# Altium PCB STM32EVALBOARD.PcbDoc (part 1 of 2)
Units mil, origin at the board's own origin, x right, y up, seen from the top; angles counter-clockwise.
Board outline 3937.01 x 3937.01 mil, 4 copper layers (Top Layer, GND, POWER, Bottom Layer), stack 23.756 mil thick; 220 components, 164 nets, 674 pads, 227 vias.
Unrouted connection lines stored in the file: 178.
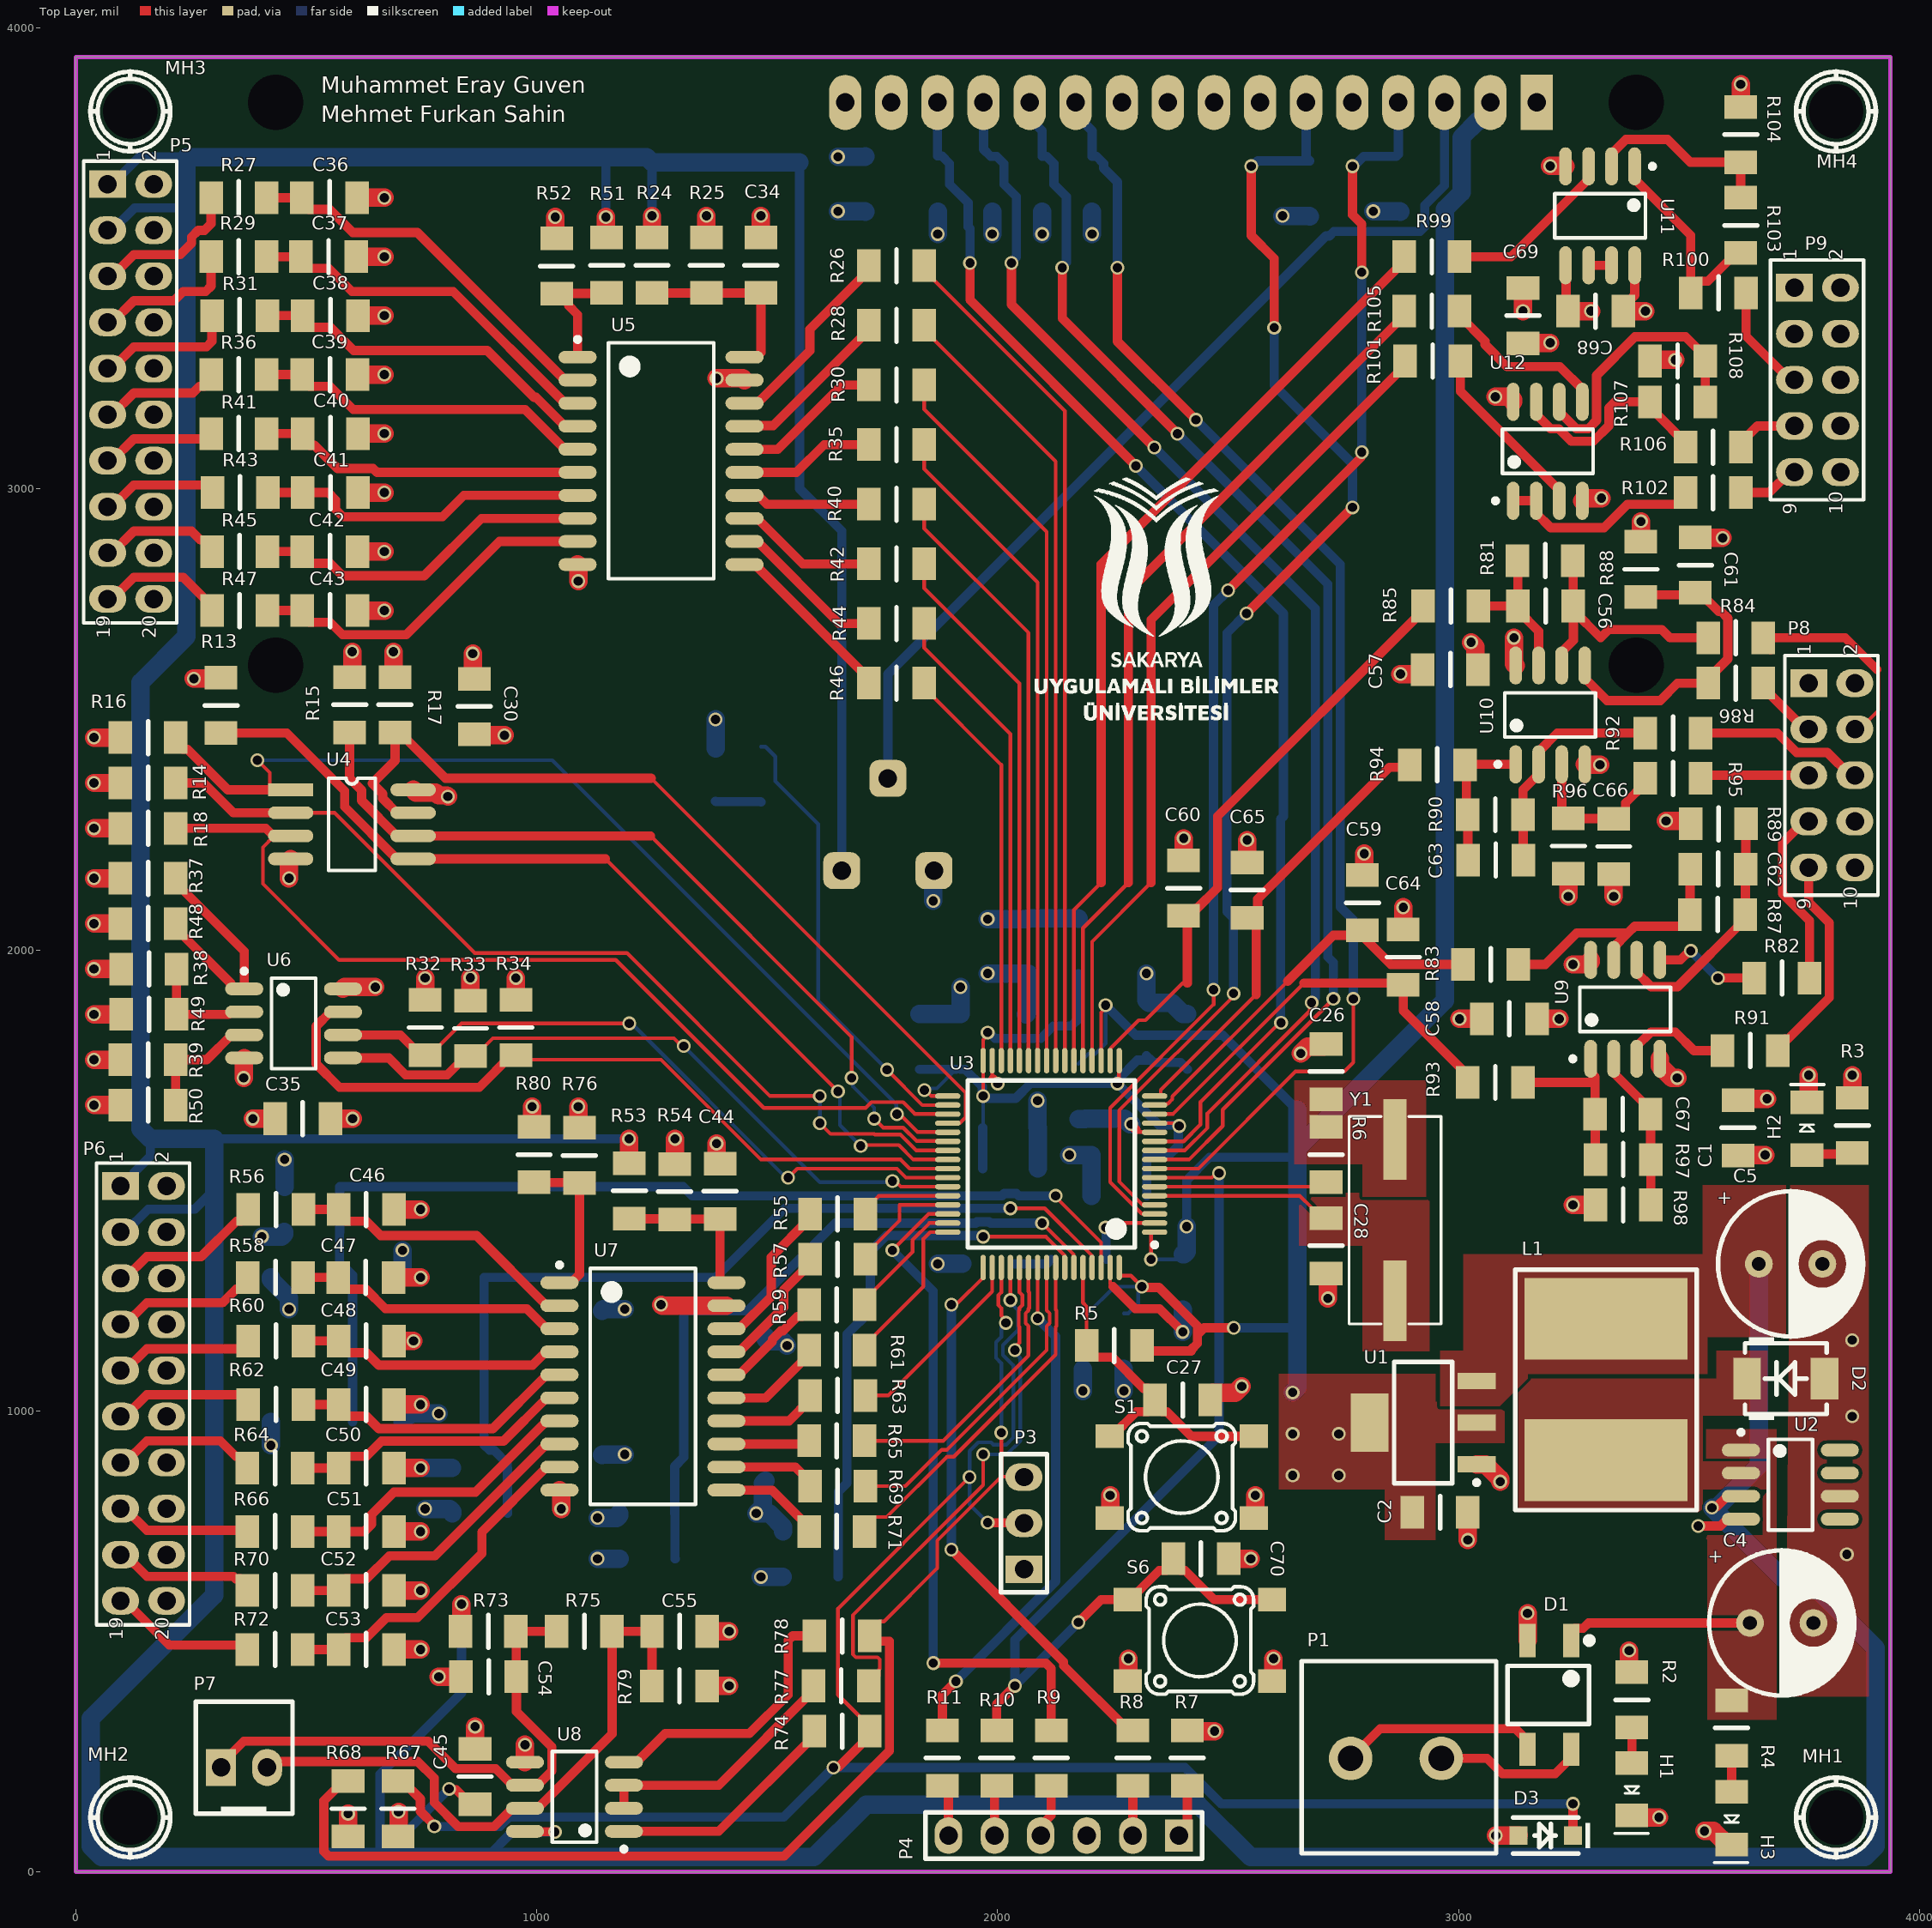
[diagram p0: Top Layer view]
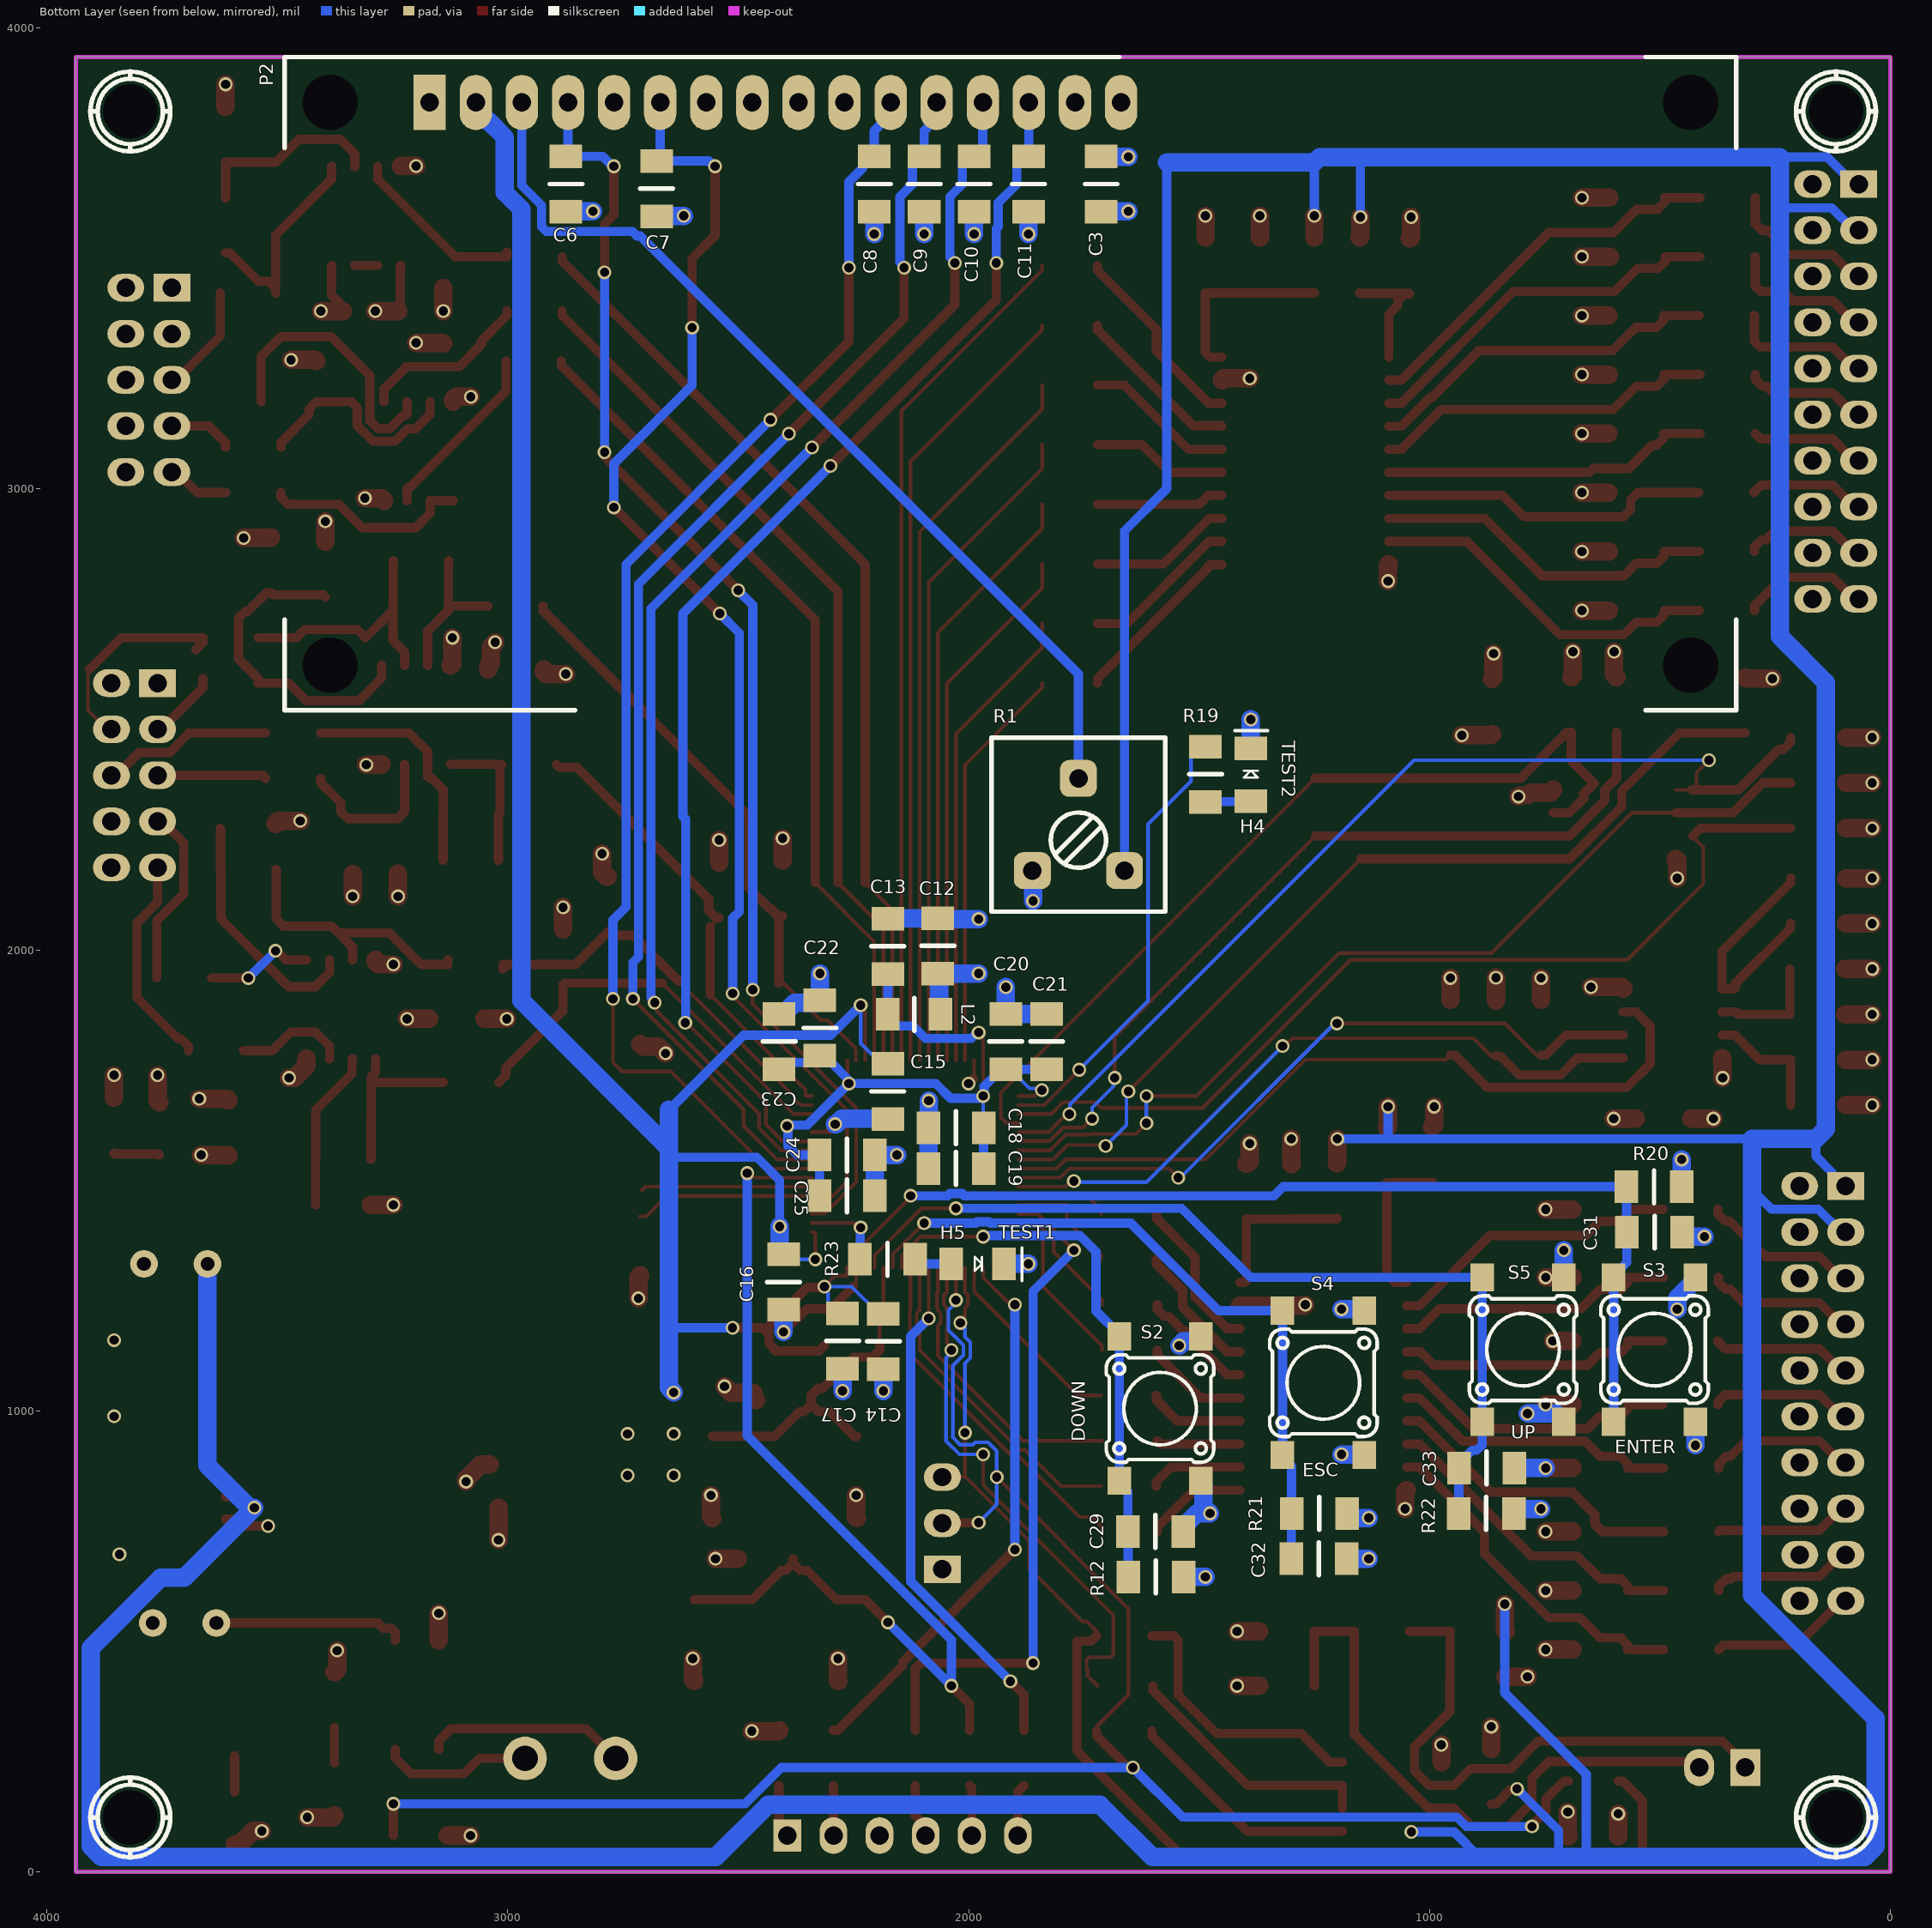
[diagram p1: Bottom Layer view, seen from below]
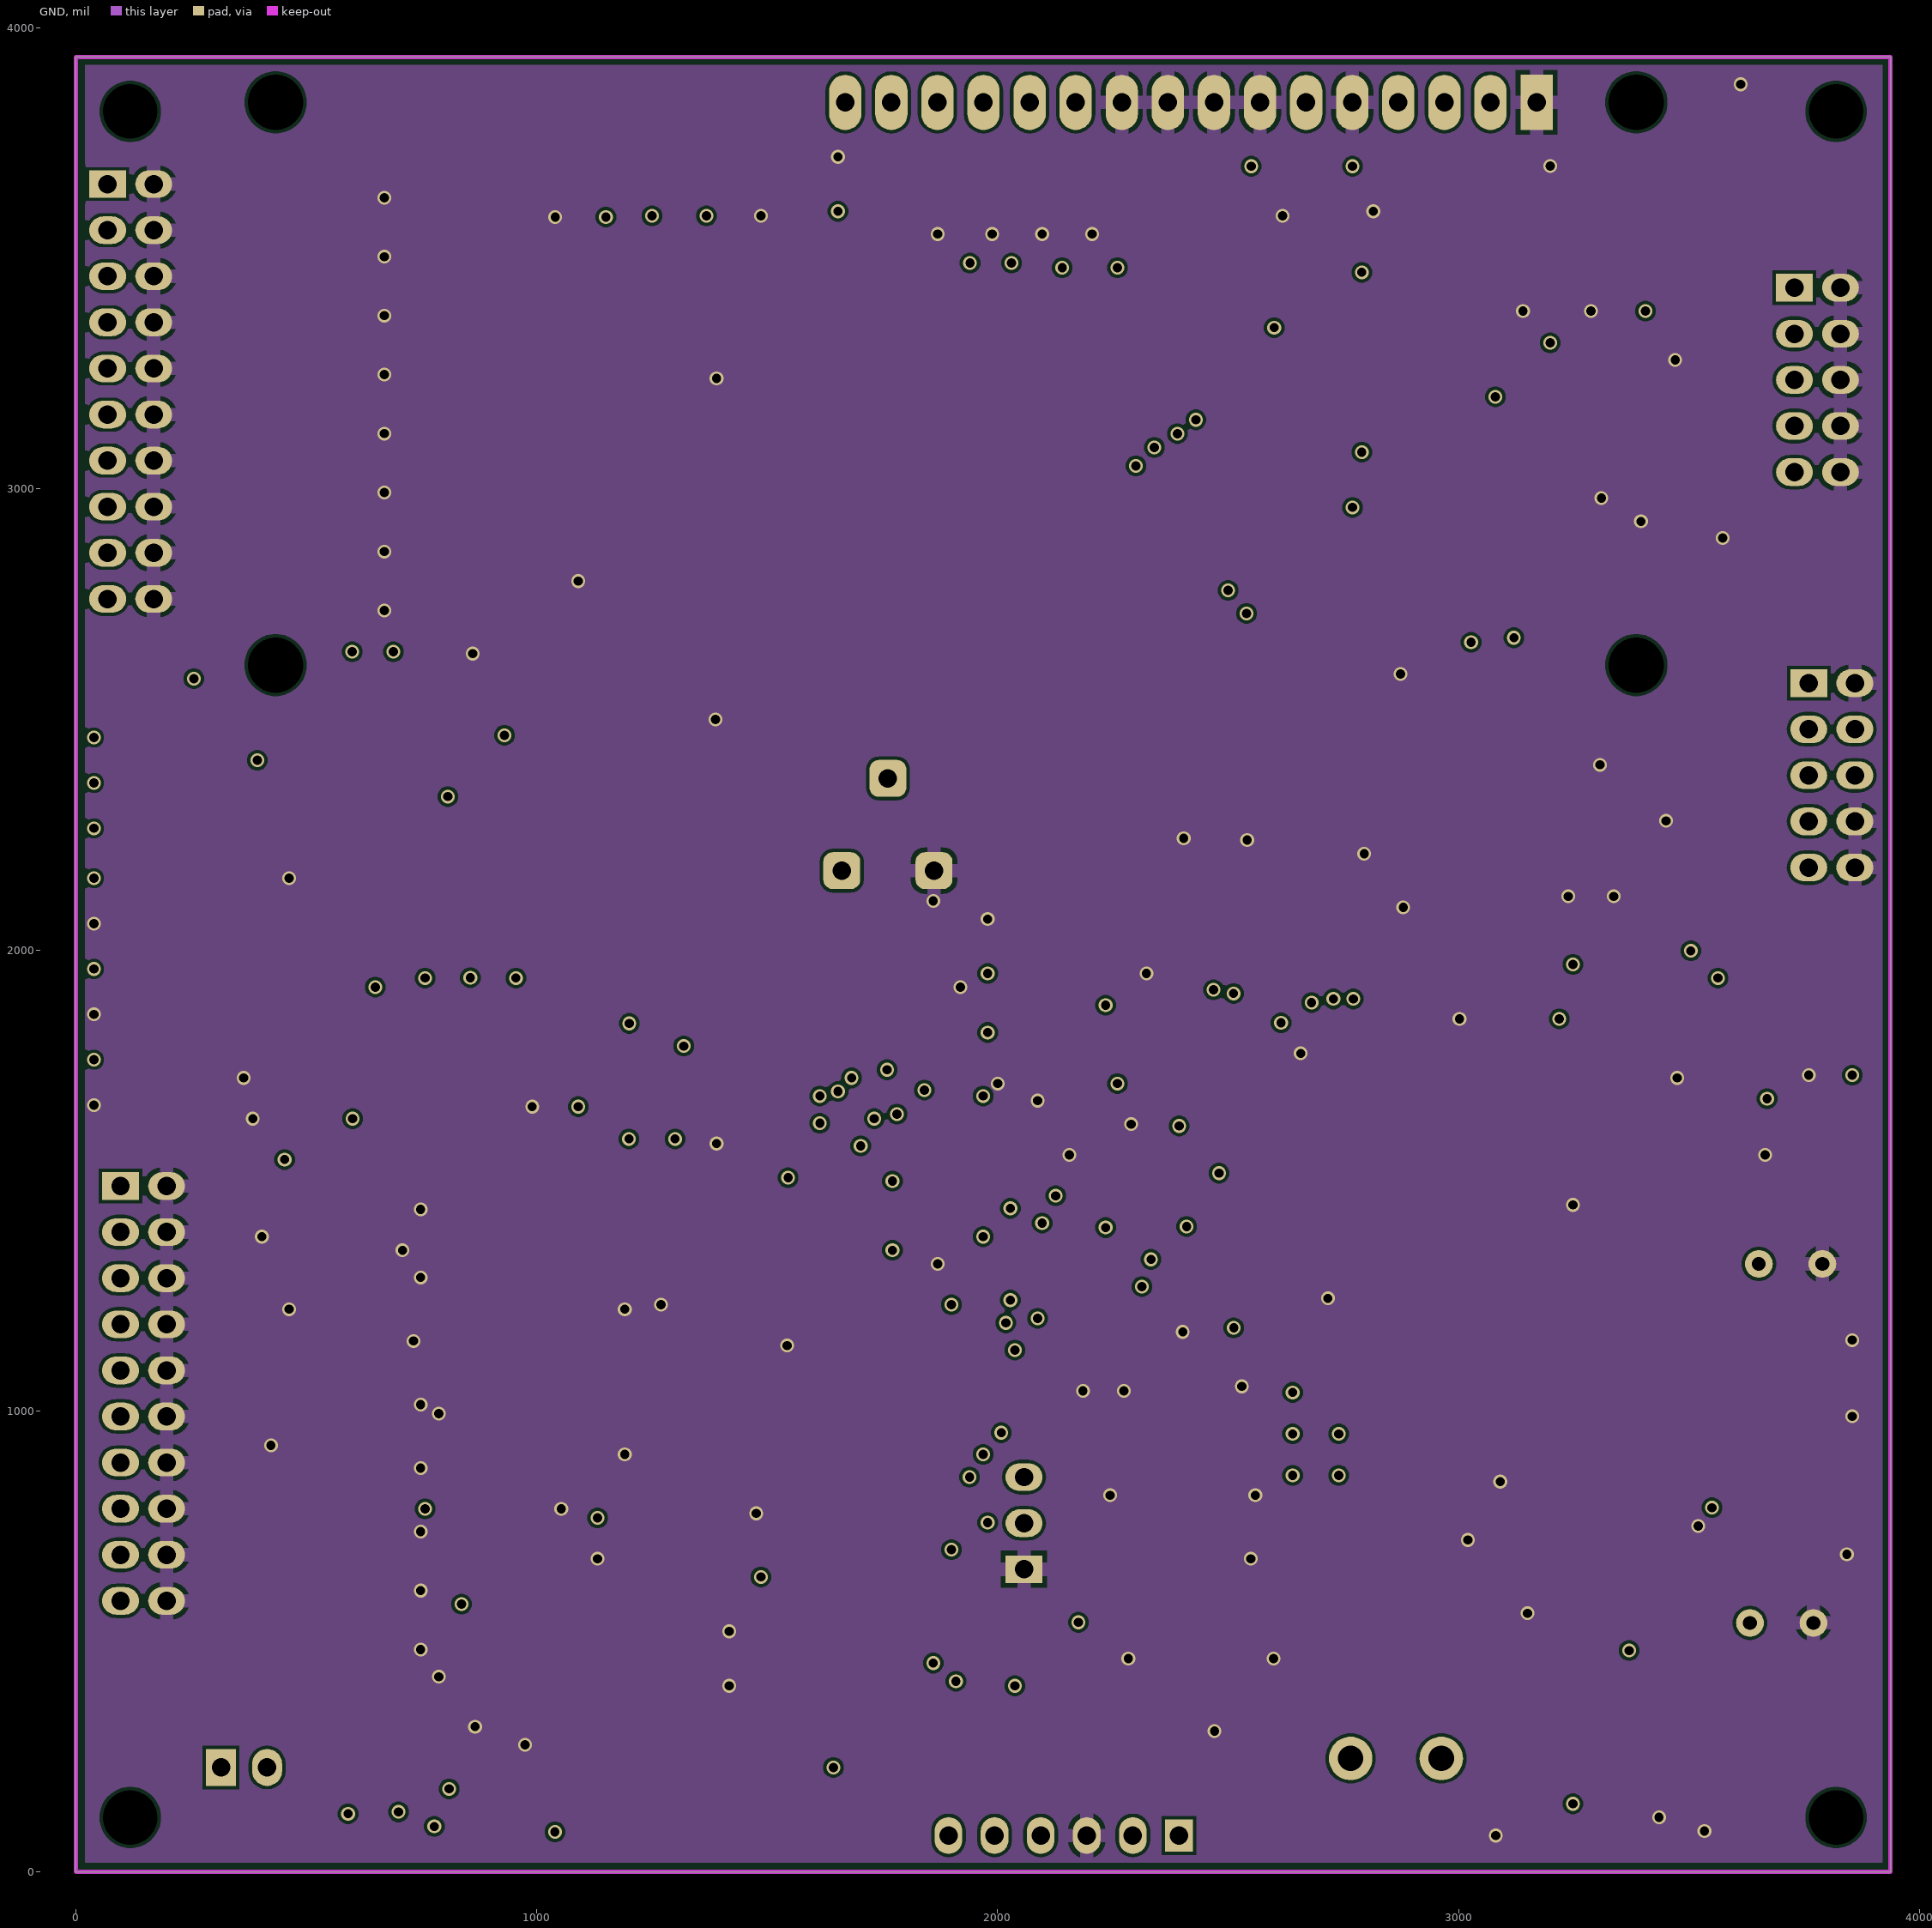
[diagram p2: GND]
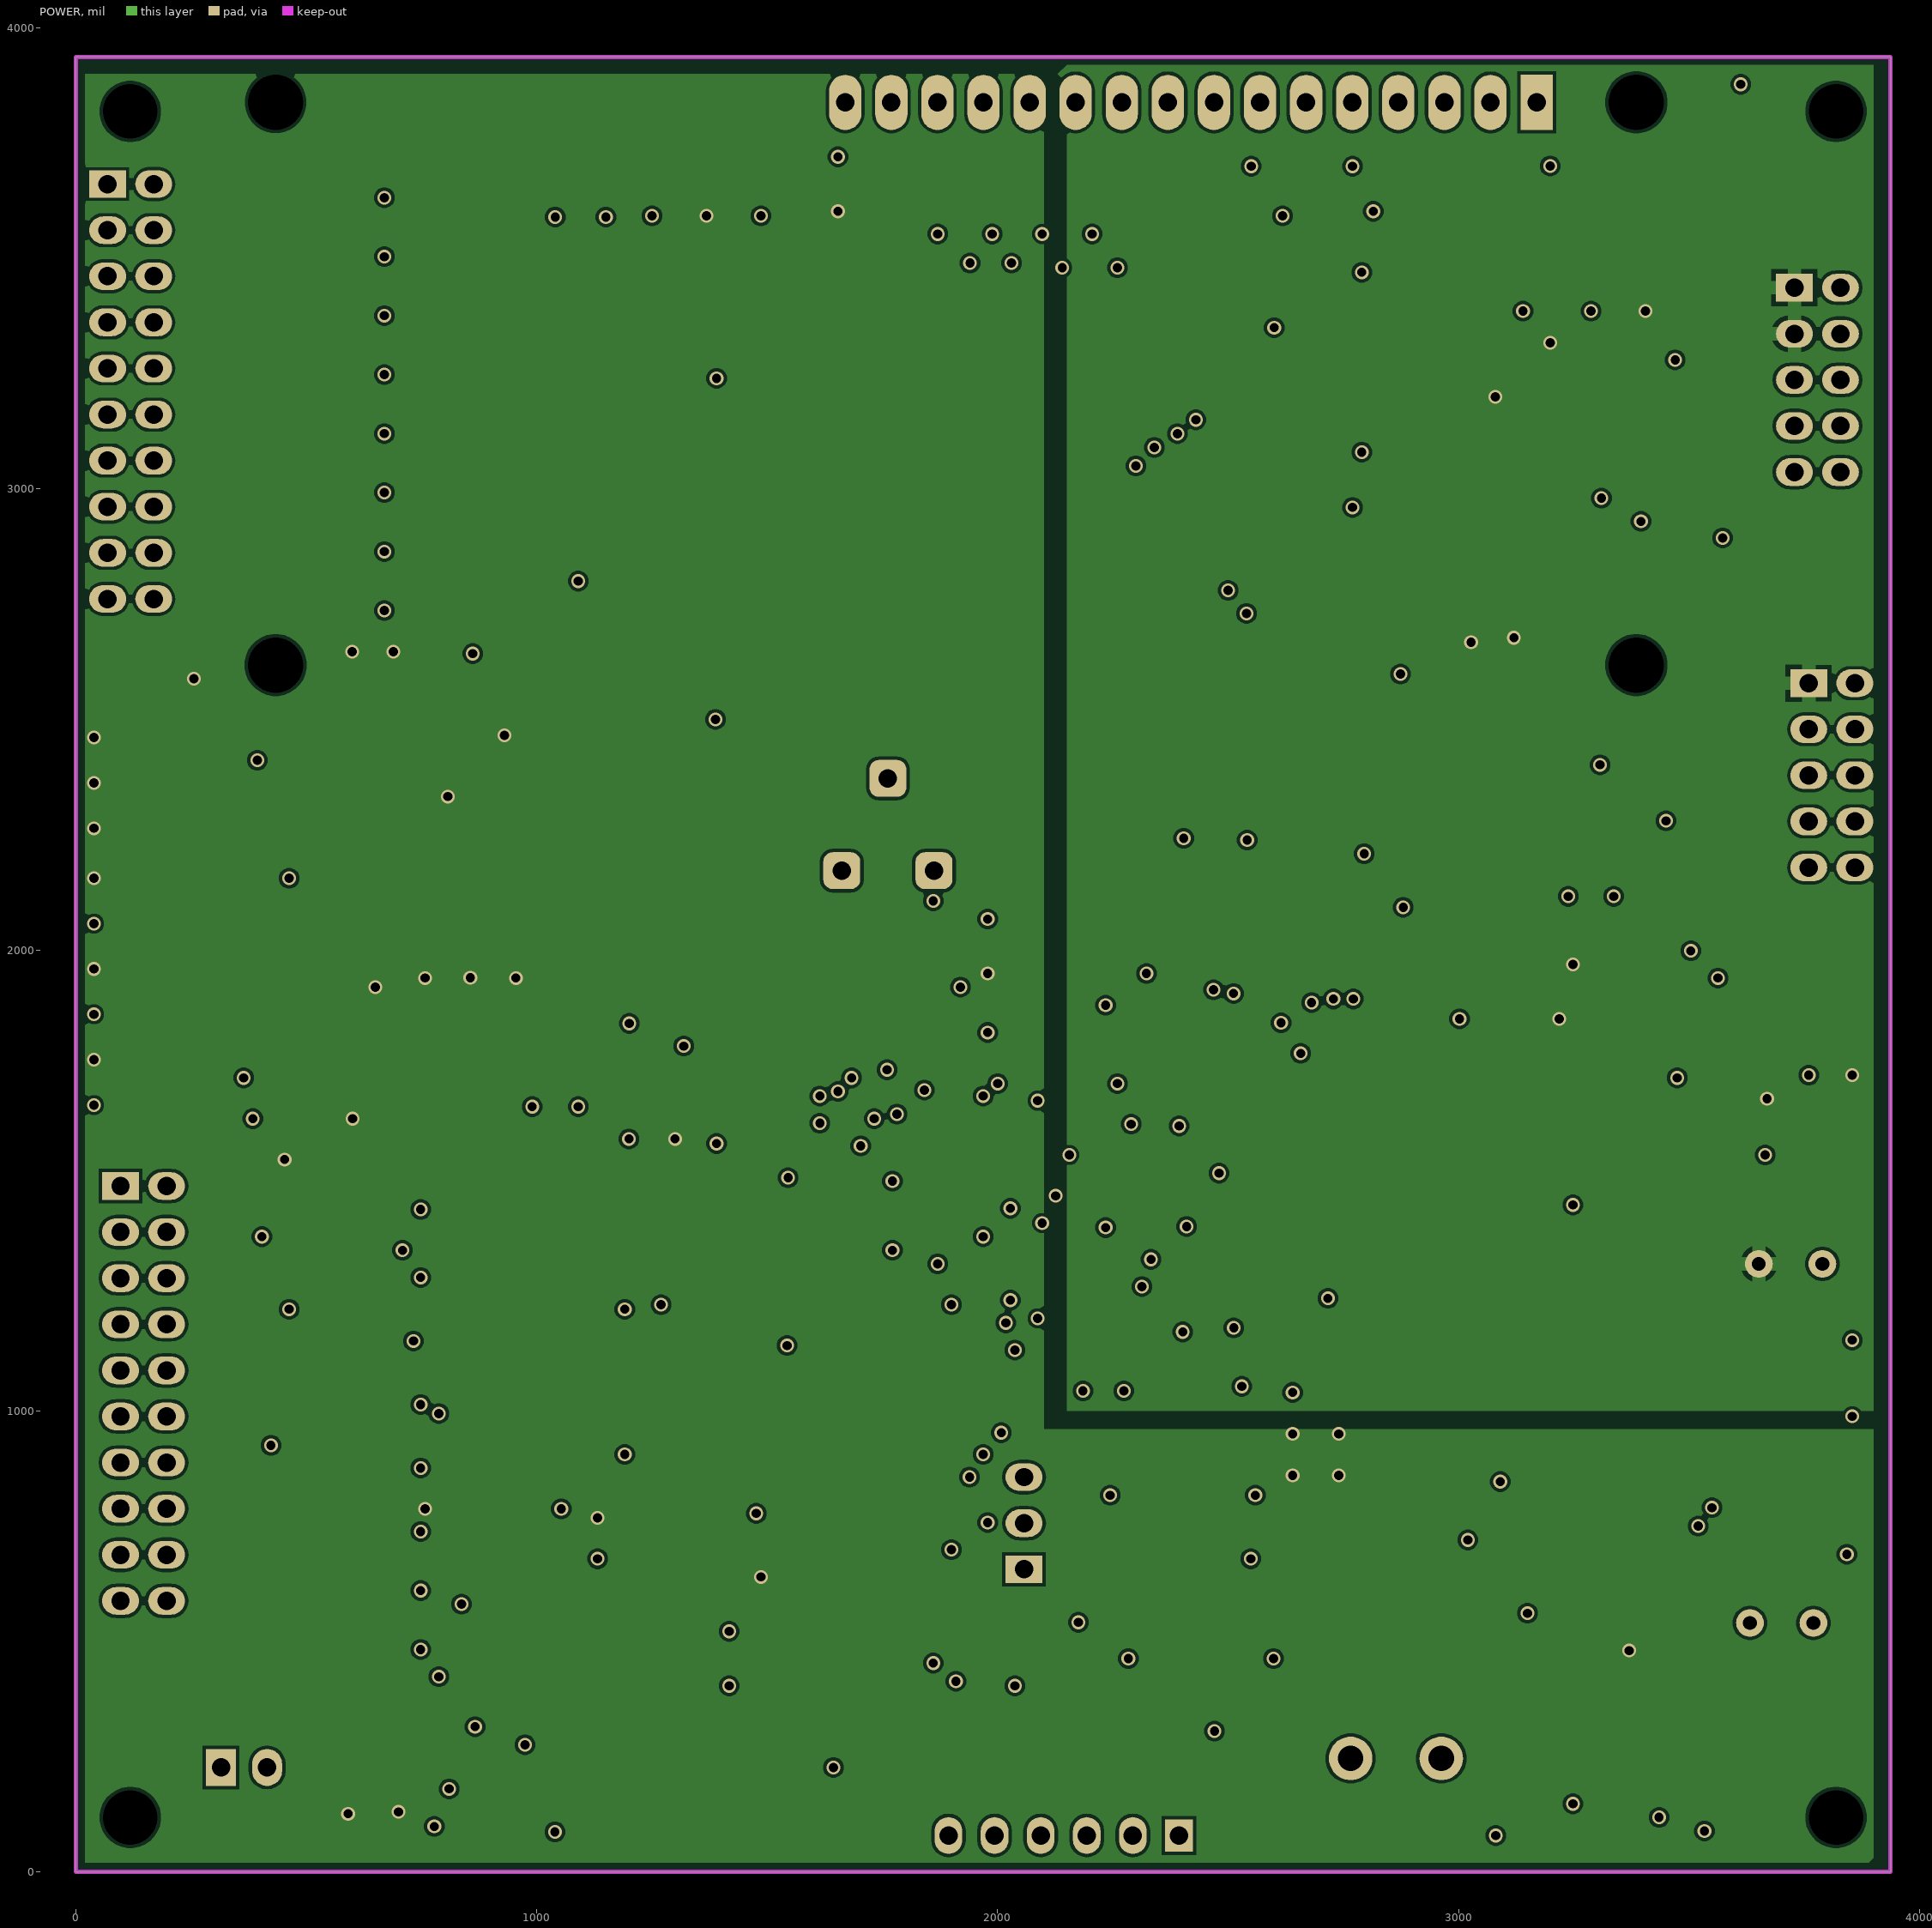
[diagram p3: POWER]
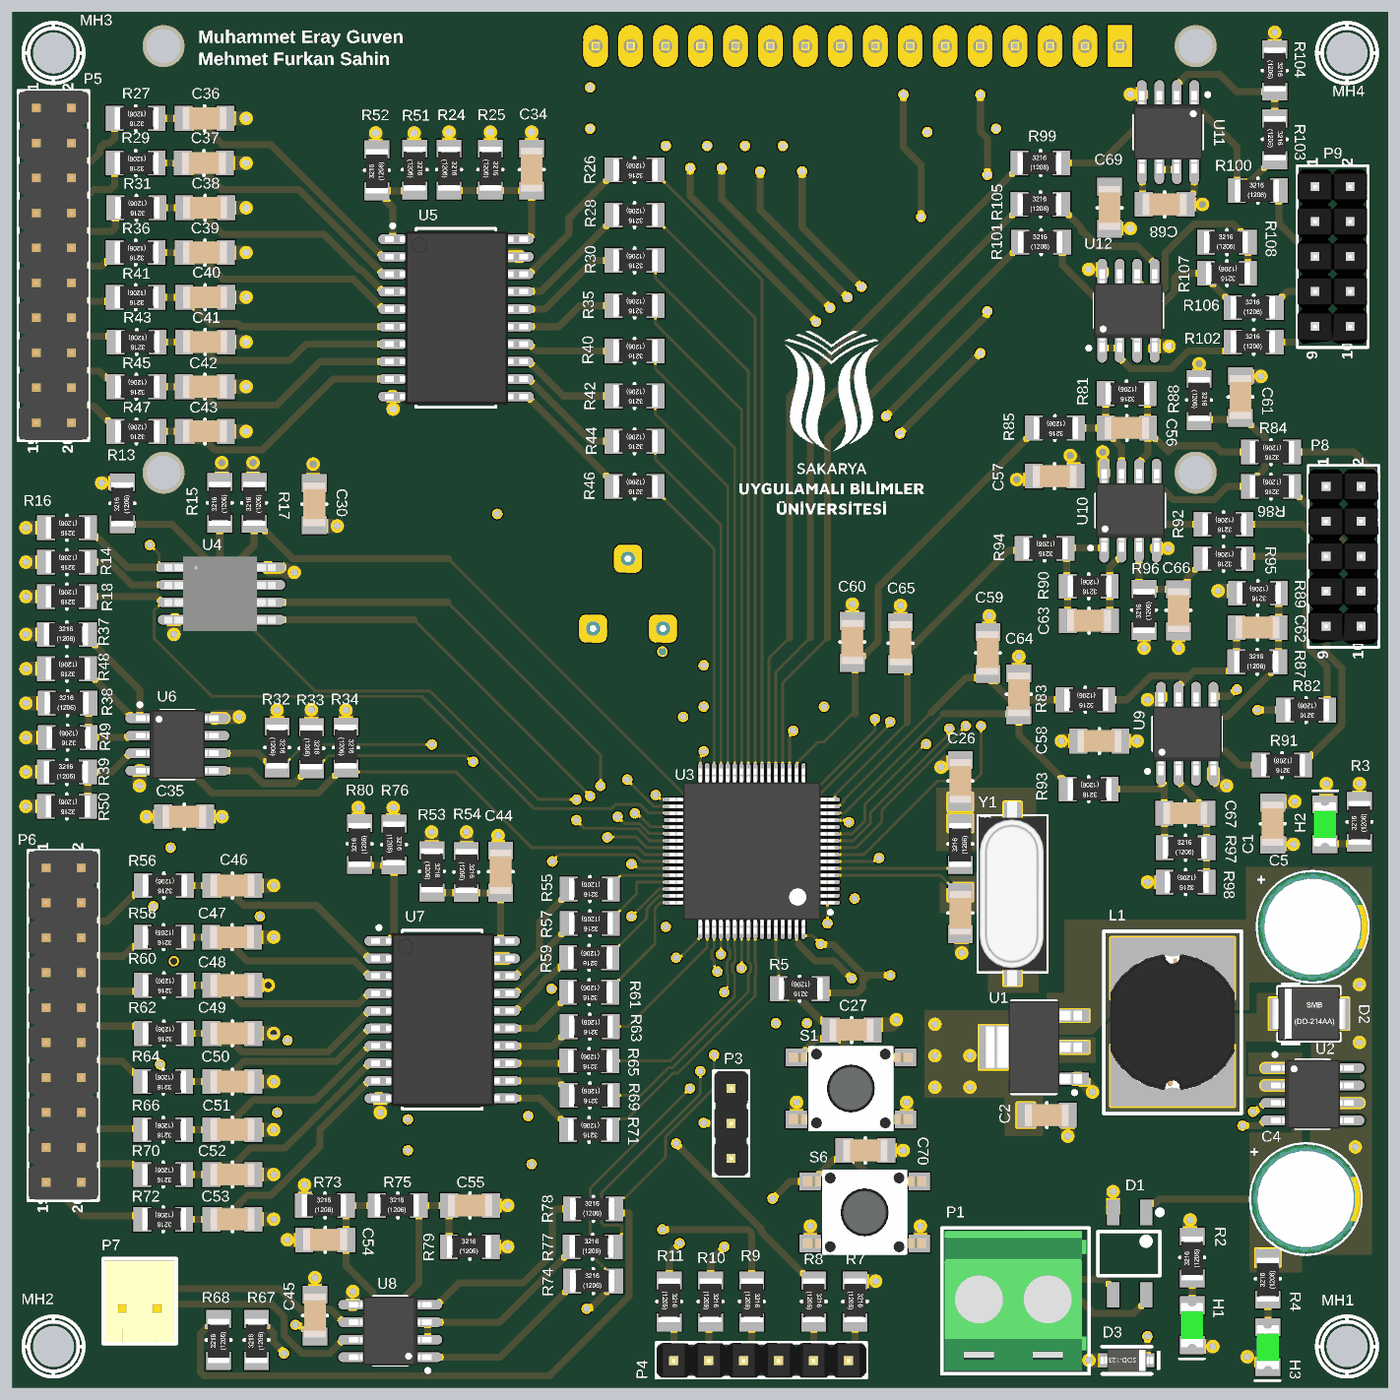
[diagram p5: 3D render of the assembled board from above, using the file's embedded part models]
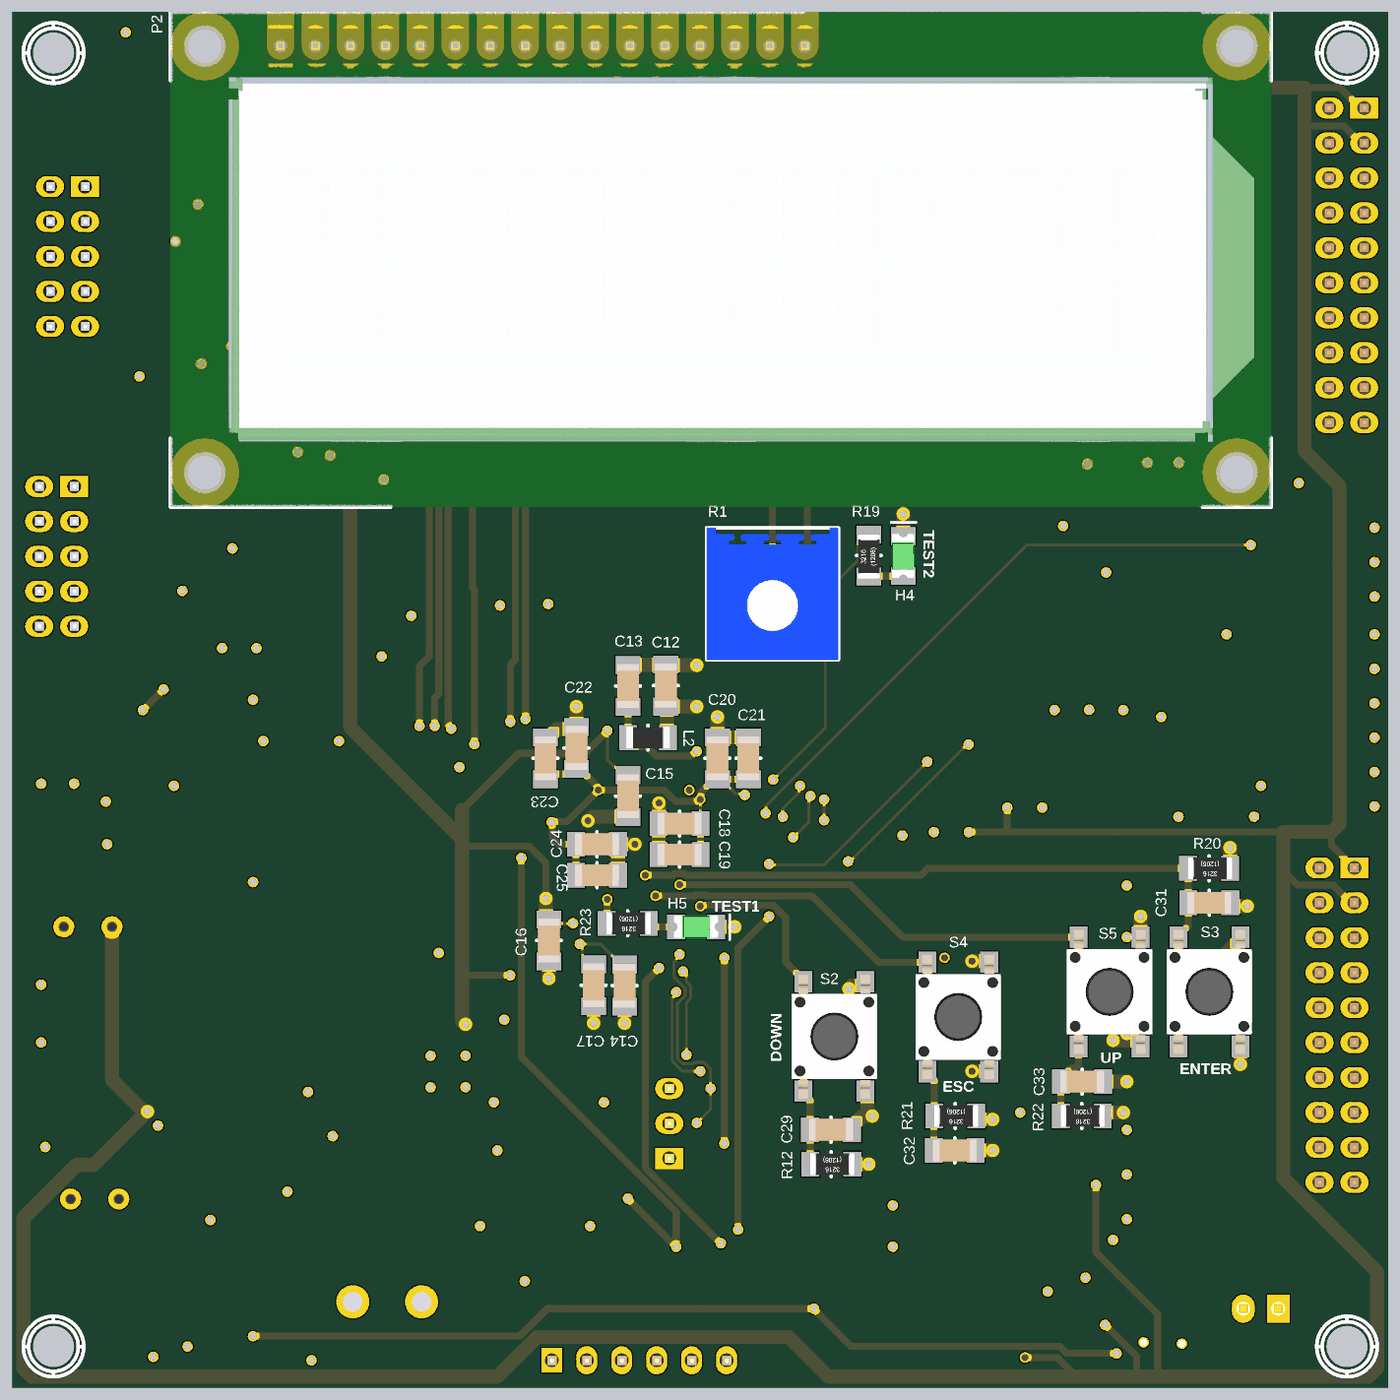
[diagram p6: 3D render of the assembled board from below, using the file's embedded part models]

## Layer stack, top to bottom
Top Solder: solder mask 0.4, Solder Resist, Dk 3.5
Top Layer: signal copper 1.4
Dielectric 2: prepreg 2.8, PP-006, Dk 4.1
GND: signal copper 1.378
Dielectric 1: dielectric 12.6, FR-4, Dk 4.8
POWER: signal copper 1.378
Dielectric 3: prepreg 2.8, PP-006, Dk 4.1
Bottom Layer: signal copper 1.4
Bottom Solder: solder mask 0.4, Solder Resist, Dk 3.5

## Board outline
0,0 0,3937.01 3937.01,3937.01 3937.01,0

## Design rules (kind name [scope] priority, off if disabled: settings)
Clearance [All] p1: gap=7 ignorepadtopadclearanceinfootprint=FALSE
Height [All] p1: minheight=0 maxheight=10000 prefheight=500
HoleSize [All] p1: absolutevalues=TRUE maxlimit=1000 minlimit=1 maxpercent=80.000 minpercent=20.000
PolygonConnect PolygonConnect_26 [All vs IsNamedPolygon('OSC_IN_L01_P033')] p1: connectstyle=Direct reliefconductorwidth=10 reliefentries=4 polygonreliefangle="90 Angle" airgapwidth=10
PolygonConnect PolygonConnect_25 [All vs IsNamedPolygon('NETC26_2_L01_P030')] p2: connectstyle=Direct reliefconductorwidth=10 reliefentries=4 polygonreliefangle="90 Angle" airgapwidth=10
PolygonConnect PolygonConnect_24 [All vs IsNamedPolygon('0V_L01_P029')] p3: connectstyle=Direct reliefconductorwidth=10 reliefentries=4 polygonreliefangle="90 Angle" airgapwidth=10
PolygonConnect PolygonConnect_23 [All vs IsNamedPolygon('+5VD_L03_P001')] p4: thpad.connectstyle=Relief thpad.reliefconductorwidth=30 thpad.reliefentries=4 thpad.polygonreliefangle="90 Angle" thpad.airgapwidth=10 smdpad.connectstyle=Relief smdpad.reliefconductorwidth=30 smdpad.reliefentries=4 smdpad.polygonreliefangle="90 Angle" smdpad.airgapwidth=10 via.connectstyle=Direct via.reliefconductorwidth=10 via.reliefentries=4 via.polygonreliefangle="90 Angle" via.airgapwidth=10
PolygonConnect PolygonConnect_22 [All vs IsNamedPolygon('3V3D_L03_P000')] p5: thpad.connectstyle=Relief thpad.reliefconductorwidth=30 thpad.reliefentries=4 thpad.polygonreliefangle="90 Angle" thpad.airgapwidth=10 smdpad.connectstyle=Relief smdpad.reliefconductorwidth=30 smdpad.reliefentries=4 smdpad.polygonreliefangle="90 Angle" smdpad.airgapwidth=10 via.connectstyle=Direct via.reliefconductorwidth=10 via.reliefentries=4 via.polygonreliefangle="90 Angle" via.airgapwidth=10
PolygonConnect PolygonConnect_21 [All vs IsNamedPolygon('0V_L02_P002')] p6: thpad.connectstyle=Relief thpad.reliefconductorwidth=30 thpad.reliefentries=4 thpad.polygonreliefangle="90 Angle" thpad.airgapwidth=10 smdpad.connectstyle=Relief smdpad.reliefconductorwidth=30 smdpad.reliefentries=4 smdpad.polygonreliefangle="90 Angle" smdpad.airgapwidth=10 via.connectstyle=Direct via.reliefconductorwidth=10 via.reliefentries=4 via.polygonreliefangle="90 Angle" via.airgapwidth=10
PolygonConnect PolygonConnect_20 [All vs IsNamedPolygon('+5VD_L01_P020')] p7: connectstyle=Direct reliefconductorwidth=10 reliefentries=4 polygonreliefangle="90 Angle" airgapwidth=10
PolygonConnect PolygonConnect_19 [All vs IsNamedPolygon('VCC_L01_P028')] p8: connectstyle=Direct reliefconductorwidth=10 reliefentries=4 polygonreliefangle="90 Angle" airgapwidth=10
PolygonConnect PolygonConnect_18 [All vs IsNamedPolygon('NETD2_2_L01_P026')] p9: connectstyle=Direct reliefconductorwidth=10 reliefentries=4 polygonreliefangle="90 Angle" airgapwidth=10
PolygonConnect PolygonConnect_17 [All vs IsNamedPolygon('3V3D_L01_P023')] p10: connectstyle=Direct reliefconductorwidth=10 reliefentries=4 polygonreliefangle="90 Angle" airgapwidth=10
PolygonConnect PolygonConnect_16 [All vs IsNamedPolygon('3V3D_L01_P023')] p11: connectstyle=Direct reliefconductorwidth=10 reliefentries=4 polygonreliefangle="90 Angle" airgapwidth=10
PolygonConnect PolygonConnect_15 [All vs IsNamedPolygon('VCC_L01_P028')] p12: thpad.connectstyle=Relief thpad.reliefconductorwidth=30 thpad.reliefentries=4 thpad.polygonreliefangle="90 Angle" thpad.airgapwidth=10 smdpad.connectstyle=Relief smdpad.reliefconductorwidth=30 smdpad.reliefentries=4 smdpad.polygonreliefangle="90 Angle" smdpad.airgapwidth=10 via.connectstyle=Direct via.reliefconductorwidth=10 via.reliefentries=4 via.polygonreliefangle="90 Angle" via.airgapwidth=10
PolygonConnect PolygonConnect_14 [All vs IsNamedPolygon('VCC_L01_P028')] p13: thpad.connectstyle=Relief thpad.reliefconductorwidth=30 thpad.reliefentries=4 thpad.polygonreliefangle="90 Angle" thpad.airgapwidth=30 smdpad.connectstyle=Relief smdpad.reliefconductorwidth=30 smdpad.reliefentries=4 smdpad.polygonreliefangle="90 Angle" smdpad.airgapwidth=30 via.connectstyle=Direct via.reliefconductorwidth=10 via.reliefentries=4 via.polygonreliefangle="90 Angle" via.airgapwidth=10
PolygonConnect PolygonConnect_13 [All vs IsNamedPolygon('+5VD_L01_P020')] p14: thpad.connectstyle=Relief thpad.reliefconductorwidth=30 thpad.reliefentries=4 thpad.polygonreliefangle="90 Angle" thpad.airgapwidth=10 smdpad.connectstyle=Relief smdpad.reliefconductorwidth=30 smdpad.reliefentries=4 smdpad.polygonreliefangle="90 Angle" smdpad.airgapwidth=10 via.connectstyle=Direct via.reliefconductorwidth=10 via.reliefentries=4 via.polygonreliefangle="90 Angle" via.airgapwidth=10
PolygonConnect PolygonConnect_12 [All vs IsNamedPolygon('NETD2_2_L01_P026')] p15: thpad.connectstyle=Relief thpad.reliefconductorwidth=30 thpad.reliefentries=4 thpad.polygonreliefangle="90 Angle" thpad.airgapwidth=10 smdpad.connectstyle=Relief smdpad.reliefconductorwidth=30 smdpad.reliefentries=4 smdpad.polygonreliefangle="90 Angle" smdpad.airgapwidth=10 via.connectstyle=Direct via.reliefconductorwidth=10 via.reliefentries=4 via.polygonreliefangle="90 Angle" via.airgapwidth=10
PolygonConnect PolygonConnect_11 [All vs IsNamedPolygon('3V3D_L01_P023')] p16: thpad.connectstyle=Relief thpad.reliefconductorwidth=30 thpad.reliefentries=4 thpad.polygonreliefangle="90 Angle" thpad.airgapwidth=10 smdpad.connectstyle=Relief smdpad.reliefconductorwidth=30 smdpad.reliefentries=4 smdpad.polygonreliefangle="90 Angle" smdpad.airgapwidth=10 via.connectstyle=Direct via.reliefconductorwidth=10 via.reliefentries=4 via.polygonreliefangle="90 Angle" via.airgapwidth=10
PolygonConnect PolygonConnect_10 [All vs IsNamedPolygon('+5VD_L01_P020')] p17: thpad.connectstyle=Relief thpad.reliefconductorwidth=30 thpad.reliefentries=4 thpad.polygonreliefangle="90 Angle" thpad.airgapwidth=30 smdpad.connectstyle=Relief smdpad.reliefconductorwidth=30 smdpad.reliefentries=4 smdpad.polygonreliefangle="90 Angle" smdpad.airgapwidth=30 via.connectstyle=Direct via.reliefconductorwidth=10 via.reliefentries=4 via.polygonreliefangle="90 Angle" via.airgapwidth=10
PolygonConnect PolygonConnect_9 [All vs IsNamedPolygon('3V3D_L01_P023')] p18: thpad.connectstyle=Relief thpad.reliefconductorwidth=30 thpad.reliefentries=4 thpad.polygonreliefangle="90 Angle" thpad.airgapwidth=30 smdpad.connectstyle=Relief smdpad.reliefconductorwidth=30 smdpad.reliefentries=4 smdpad.polygonreliefangle="90 Angle" smdpad.airgapwidth=30 via.connectstyle=Direct via.reliefconductorwidth=10 via.reliefentries=4 via.polygonreliefangle="90 Angle" via.airgapwidth=10
PolygonConnect PolygonConnect_8 [All vs IsNamedPolygon('NETD2_2_L01_P026')] p19: thpad.connectstyle=Relief thpad.reliefconductorwidth=30 thpad.reliefentries=4 thpad.polygonreliefangle="90 Angle" thpad.airgapwidth=30 smdpad.connectstyle=Relief smdpad.reliefconductorwidth=30 smdpad.reliefentries=4 smdpad.polygonreliefangle="90 Angle" smdpad.airgapwidth=30 via.connectstyle=Direct via.reliefconductorwidth=10 via.reliefentries=4 via.polygonreliefangle="90 Angle" via.airgapwidth=10
PolygonConnect PolygonConnect_7 [All vs IsNamedPolygon('NETD2_2_L01_P026')] p20: thpad.connectstyle=Relief thpad.reliefconductorwidth=30 thpad.reliefentries=4 thpad.polygonreliefangle="90 Angle" thpad.airgapwidth=30 smdpad.connectstyle=Relief smdpad.reliefconductorwidth=0 smdpad.reliefentries=4 smdpad.polygonreliefangle="90 Angle" smdpad.airgapwidth=10 via.connectstyle=Direct via.reliefconductorwidth=10 via.reliefentries=4 via.polygonreliefangle="90 Angle" via.airgapwidth=10
PolygonConnect PolygonConnect_6 [All vs IsNamedPolygon('NONET_L01_P024')] p21: thpad.connectstyle=Relief thpad.reliefconductorwidth=30 thpad.reliefentries=4 thpad.polygonreliefangle="90 Angle" thpad.airgapwidth=10 smdpad.connectstyle=Relief smdpad.reliefconductorwidth=30 smdpad.reliefentries=4 smdpad.polygonreliefangle="90 Angle" smdpad.airgapwidth=10 via.connectstyle=Direct via.reliefconductorwidth=10 via.reliefentries=4 via.polygonreliefangle="90 Angle" via.airgapwidth=10
PolygonConnect PolygonConnect_5 [All vs IsNamedPolygon('+5VD_L01_P020')] p22: thpad.connectstyle=Relief thpad.reliefconductorwidth=30 thpad.reliefentries=4 thpad.polygonreliefangle="90 Angle" thpad.airgapwidth=10 smdpad.connectstyle=Relief smdpad.reliefconductorwidth=30 smdpad.reliefentries=4 smdpad.polygonreliefangle="90 Angle" smdpad.airgapwidth=10 via.connectstyle=Direct via.reliefconductorwidth=10 via.reliefentries=4 via.polygonreliefangle="90 Angle" via.airgapwidth=10
PolygonConnect PolygonConnect_4 [All vs IsNamedPolygon('0V_L02_P002')] p23: thpad.connectstyle=Relief thpad.reliefconductorwidth=30 thpad.reliefentries=4 thpad.polygonreliefangle="90 Angle" thpad.airgapwidth=30 smdpad.connectstyle=Relief smdpad.reliefconductorwidth=30 smdpad.reliefentries=4 smdpad.polygonreliefangle="90 Angle" smdpad.airgapwidth=30 via.connectstyle=Direct via.reliefconductorwidth=10 via.reliefentries=4 via.polygonreliefangle="90 Angle" via.airgapwidth=10
PolygonConnect PolygonConnect_3 [All vs IsNamedPolygon('+5VD_L03_P001')] p24: thpad.connectstyle=Relief thpad.reliefconductorwidth=30 thpad.reliefentries=4 thpad.polygonreliefangle="90 Angle" thpad.airgapwidth=30 smdpad.connectstyle=Relief smdpad.reliefconductorwidth=30 smdpad.reliefentries=4 smdpad.polygonreliefangle="90 Angle" smdpad.airgapwidth=30 via.connectstyle=Direct via.reliefconductorwidth=10 via.reliefentries=4 via.polygonreliefangle="90 Angle" via.airgapwidth=10
PolygonConnect PolygonConnect_2 [All vs IsNamedPolygon('NONET_L03_P000')] p25: thpad.connectstyle=Relief thpad.reliefconductorwidth=30 thpad.reliefentries=4 thpad.polygonreliefangle="90 Angle" thpad.airgapwidth=30 smdpad.connectstyle=Relief smdpad.reliefconductorwidth=30 smdpad.reliefentries=4 smdpad.polygonreliefangle="90 Angle" smdpad.airgapwidth=30 via.connectstyle=Direct via.reliefconductorwidth=10 via.reliefentries=4 via.polygonreliefangle="90 Angle" via.airgapwidth=10
PolygonConnect PolygonConnect_1 [All vs IsNamedPolygon('NONET_L03_P000')] p26: thpad.connectstyle=Relief thpad.reliefconductorwidth=30 thpad.reliefentries=4 thpad.polygonreliefangle="90 Angle" thpad.airgapwidth=10 smdpad.connectstyle=Relief smdpad.reliefconductorwidth=10 smdpad.reliefentries=4 smdpad.polygonreliefangle="90 Angle" smdpad.airgapwidth=10 via.connectstyle=Direct via.reliefconductorwidth=10 via.reliefentries=4 via.polygonreliefangle="90 Angle" via.airgapwidth=10
PolygonConnect [All] p27: connectstyle=Relief reliefconductorwidth=10 reliefentries=4 polygonreliefangle="90 Angle" airgapwidth=10
RoutingVias [All] p1: holewidth=20 width=30 viastyle="Through Hole" minholewidth=20 minwidth=30 maxholewidth=20 maxwidth=30
SolderMaskExpansion [All] p1: expansion=4 istentingtop=FALSE
SupplyNets "Schematic Supply Nets_5" [InNet('VDDA')] p1: voltage=0.000
SupplyNets "Schematic Supply Nets_4" [InNet('0V')] p2: voltage=0.000
SupplyNets "Schematic Supply Nets_3" [InNet('+5VD')] p3: voltage=0.000
SupplyNets "Schematic Supply Nets_1" [InNet('3V3D')] p4: voltage=0.000
SupplyNets "Schematic Supply Nets" [InNet('VCC')] p5: voltage=0.000
Width [All] p1: maxlimit=100 minlimit=8 preferedwidth=20 minimp=50.000000 maximp=50.000000 favimp=50.000000
28 further rules are at their usual default settings.

## Classes and differential pairs
component class STM32EVALBOARD: C1 C2 C3 C4 C5 C6 C7 C8 C9 C10 C11 C12 C13 C14 C15 C16 C17 C18 C19 C20 C21 C22 C23 C24 C25 C26 C27 C28 C70 D1 D2 H1 H2 H3 L1 L2 MH1 MH2 MH3 MH4 P1 P2 P3 P4 R1 R2 R3 R4 R5 R6 R7 R8 R9 R10 R11 S1 S6 U1 U2 U3 Y1
component class Digital: C29 C30 C31 C32 C33 C34 C35 C36 C37 C38 C39 C40 C41 C42 C43 C44 C45 C46 C47 C48 C49 C50 C51 C52 C53 C54 C55 D3 H4 H5 P5 P6 P7 R12 R13 R14 R15 R16 R17 R18 R19 R20 R21 R22 R23 R24 R25 R26 R27 R28 R29 R30 R31 R32 R33 R34 R35 R36 R37 R38 R39 R40 R41 R42 R43 R44 R45 R46 R47 R48 R49 R50 R51 R52 R53 R54 R55 R56 R57 R58 R59 R60 R61 R62 R63 R64 R65 R66 R67 R68 R69 R70 R71 R72 R73 R74 R75 R76 R77 R78 R79 R80 S2 S3 S4 S5 U4 U5 U6 U7 U8
component class Analog: C56 C57 C58 C59 C60 C61 C62 C63 C64 C65 C66 C67 C68 C69 P8 P9 R81 R82 R83 R84 R85 R86 R87 R88 R89 R90 R91 R92 R93 R94 R95 R96 R97 R98 R99 R100 R101 R102 R103 R104 R105 R106 R107 R108 U9 U10 U11 U12

## Components (designator, comment, footprint, x,y, rotation, side; value= is the part's Value field where it differs from the comment)
C1 "10uF" CC3216-1206L 3606.3,1614.17 r270 top
C2 "10uF" CC3216-1206L 2960,780 r0 top
C3 "100n" CC3216-1206L 1712.6,3661.42 r90 bottom
C4 "Value" "CAP AL-EL H12MM D8MM P3.5MM" 3701.1,540 r0 top
C5 "1000uF" "CAP AL-EL H12MM D8MM P3.5MM" 3720.47,1318.9 r0 top
C6 "1n" CC3216-1206L 2874.02,3661.42 r270 bottom
C7 "1n" CC3216-1206L 2677.17,3651.57 r270 bottom
C8 "1n" CC3216-1206L 2204.72,3661.42 r270 bottom
C9 "1n" CC3216-1206L 2096.46,3661.42 r270 bottom
C10 "1n" CC3216-1206L 1988.19,3661.42 r270 bottom
C11 "1n" CC3216-1206L 1870.08,3661.42 r270 bottom
C12 "100n" CC3216-1206L 2066.93,2008.82 r90 bottom
C13 "100n" CC3216-1206L 2175.2,2007.87 r90 bottom
C14 "4.7u" CC3216-1206L 2185.04,1150.63 r270 bottom
C15 "100n" CC3216-1206L 2175.2,1692.91 r270 bottom
C16 "100n" CC3216-1206L 2401.57,1279.53 r270 bottom
C17 "100n" CC3216-1206L 2273.62,1151.57 r270 bottom
C18 "10n" CC3216-1206L 2027.56,1614.17 r0 bottom
C19 "1u" CC3216-1206L 2027.56,1525.59 r0 bottom
C20 "10n" CC3216-1206L 1919.29,1801.18 r90 bottom
C21 "1u" CC3216-1206L 1830.71,1801.18 r90 bottom
C22 "10n" CC3216-1206L 2322.83,1830.71 r90 bottom
C23 "1u" CC3216-1206L 2411.42,1801.18 r90 bottom
C24 "10n" CC3216-1206L 2263.78,1555.12 r180 bottom
C25 "1u" CC3216-1206L 2263.78,1466.54 r180 bottom
C26 "20pF" CC3216-1206L 2712.6,1736.22 r270 top
C27 "100n" CC3216-1206L 2401.57,1023.62 r0 top
C28 "20pF" CC3216-1206L 2712.6,1358.27 r90 top
C29 "100n" CC3216-1206L 1594.49,738.19 r180 bottom
C30 "100n" CC3216-1206L 864.44,2528.02 r90 top
C31 "100n" CC3216-1206L 511.81,1387.8 r180 bottom
C32 "100n" CC3216-1206L 1240.16,679.13 r180 bottom
C33 "100n" CC3216-1206L 875.98,875.98 r180 bottom
C34 "100n" CC3216-1206L 1486.22,3485.2 r270 top
C35 "100n" CC3216-1206L 492.13,1633.86 r180 top
C36 "1n" CC3216-1206L 550.24,3631.89 r0 top
C37 "1n" CC3216-1206L 548.35,3503.94 r0 top
C38 "1n" CC3216-1206L 552.13,3375.98 r0 top
C39 "1n" CC3216-1206L 551.18,3248.03 r0 top
C40 "1n" CC3216-1206L 552.13,3120.08 r0 top
C41 "1n" CC3216-1206L 552.13,2992.13 r0 top
C42 "1n" CC3216-1206L 551.18,2864.17 r0 top
C43 "1n" CC3216-1206L 551.18,2736.22 r0 top
C44 "100n" CC3216-1206L 1397.64,1476.38 r270 top
C45 "100n" CC3216-1206L 866.14,206.69 r90 top
C46 "1n" CC3216-1206L 629.92,1437.01 r0 top
C47 "1n" CC3216-1206L 628.98,1289.37 r0 top
C48 "1n" CC3216-1206L 629.92,1151.58 r0 top
C49 "1n" CC3216-1206L 629.92,1013.78 r0 top
C50 "1n" CC3216-1206L 629.92,875.98 r0 top
C51 "1n" CC3216-1206L 629.92,738.19 r0 top
C52 "1n" CC3216-1206L 629.92,610.24 r0 top
C53 "1n" CC3216-1206L 629.92,482.28 r0 top
C54 "20p" CC3216-1206L 895.67,423.23 r180 top
C55 "20p" CC3216-1206L 1310,521.65 r0 top
C56 "Cf" CC3216-1206L 3188.98,2746.06 r180 top
C57 "100n" CC3216-1206L 2982.28,2608.27 r180 top
C58 "100n" CC3216-1206L 3110.24,1850.39 r180 top
C59 "Cf" CC3216-1206L 2791.34,2102.36 r270 top
C60 "Cf" CC3216-1206L 2403.54,2133.86 r90 top
C61 "Cf" CC3216-1206L 3513.78,2834.65 r90 top
C62 "Cf" CC3216-1206L 3562.99,2175.2 r0 top
C63 "Cf" CC3216-1206L 3080.71,2194.88 r180 top
C64 "Cf" CC3216-1206L 2879.92,1984.25 r270 top
C65 "Cf" CC3216-1206L 2541.34,2129.92 r90 top
C66 "Cf" CC3216-1206L 3336.61,2224.41 r270 top
C67 "Cf" CC3216-1206L 3356.3,1643.7 r0 top
C68 "100n" CC3216-1206L 3297.24,3385.83 r180 top
C69 "100n" CC3216-1206L 3139.76,3375.98 r90 top
C70 "100n" CC3216-1206L 2440.94,679.13 r0 top
D1 "Single Phase Bridge Diode" B10S_R2 3244.09,501.97 r270 top
D2 "SS26" SMB 3710,1070 r0 top
D3 "3.3V" SOD123 3130.24,78.74 r180 top
H1 "LED" LED1206 3375.98,236.22 r270 top
H2 "LED" LED1206 3755.91,1555.12 r90 top
H3 "LED" LED1206 3592.52,173.23 r270 top
H4 "LED" LED1206 1387.8,2322.83 r90 bottom
H5 "LED" LED1206 2037.4,1318.9 r180 bottom
L1 "100uH" FPI1005 3320,892.91 r90 top
L2 "BEAD" CL3216-1206L 2175.2,1860.24 r180 bottom
MH1 "MOUNTING HOLE" "MOUNTING HOLE ROUND NONPLATED 3MM PLASTIC" 3818.9,118.11 r0 top locked
MH2 "MOUNTING HOLE" "MOUNTING HOLE ROUND NONPLATED 3MM PLASTIC" 118.11,118.11 r0 top locked
MH3 "MOUNTING HOLE" "MOUNTING HOLE ROUND NONPLATED 3MM PLASTIC" 118.11,3818.9 r0 top locked
MH4 "MOUNTING HOLE" "MOUNTING HOLE ROUND NONPLATED 3MM PLASTIC" 3818.9,3818.9 r0 top locked
P1 "CONNECTOR, 1x2, 2P" DG128-5.0-02P-14 2962.6,246.06 r180 top
P2 "CONNECTOR LCD 1x16" LCD1602 1909.45,3228.35 r180 bottom
P3 "CONNECTOR, 1x3, 3P" HDR_MALE_1X3_3P_2.54MM_180 2057.09,656.3 r270 top
P4 "CONNECTOR 1X6-6P" HDR_MALE_1X6_56_2.54MM_180 2393.31,78.74 r0 top
P5 "CONNECTOR, 2x10, 20P" HDR_MALE_2X10_20P_2.54MM_180 68.9,3661.42 r90 top
P6 "CONNECTOR, 2x10, 20P" HDR_MALE_2X10_20P_2.54MM_180 96.85,1487.8 r90 top
P7 "CONNECTOR, 1x2, 2P" DS1070-2MVV6 314.96,226.38 r180 top
P8 "CONNECTOR, 2x5, 5P" HDR_MALE_2X5_10P_2.54MM_180 3759.84,2578.74 r90 top
P9 "CONNECTOR, 2x5, 5P" HDR_MALE_2X5_10P_2.54MM_180 3728.74,3436.61 r90 top
R1 "Trimpot" "TRIMPOT 3386" 1761.81,2238.05 r180 bottom
R2 "3k" CR3216-1206l 3375.98,313.07 r90 top
R3 "4.7k" CR3216-1206l 3854.33,1559.06 r90 top
R4 "10k" CR3216-1206l 3592.52,251.97 r90 top
R5 "4.7k" CR3216-1206l 2312.99,1141.73 r180 top
R6 "390R" CR3216-1206l 2712.6,1496.06 r90 top
R7 "10k" CR3216-1206l 2411.42,307.01 r270 top
R8 "22k" CR3216-1206l 2293.31,307.01 r270 top
R9 "22k" CR3216-1206l 2116.14,307.01 r270 top
R10 "22k" CR3216-1206l 1998.03,307.01 r270 top
R11 "22k" CR3216-1206l 1879.92,307.01 r270 top
R12 "4.7k" CR3216-1206l 1533.54,639.76 r0 bottom
R13 "10k" CR3216-1206l 314.96,2470.47 r90 top
R14 "10k" CR3216-1206l 216.54,2362.2 r180 top
R15 "10k" CR3216-1206l 593.9,2471.92 r90 top
R16 "10k" CR3216-1206l 216.54,2460.63 r180 top
R17 "10k" CR3216-1206l 692.33,2471.92 r90 top
R18 "10k" CR3216-1206l 216.54,2263.78 r180 top
R19 "3k" CR3216-1206l 1486.22,2320.94 r90 bottom
R20 "4.7k" CR3216-1206l 452.76,1486.22 r0 bottom
R21 "4.7k" CR3216-1206l 1179.21,777.56 r0 bottom
R22 "4.7k" CR3216-1206l 816.93,777.56 r0 bottom
R23 "3k" CR3216-1206l 2116.14,1328.74 r0 bottom
R24 "0R" CR3216-1206l 1250,3545.2 r270 top
R25 "0R" CR3216-1206l 1368.11,3545.2 r270 top
R26 "120R" CR3216-1206l 1840.55,3484.25 r180 top
R27 "120R" CR3216-1206l 413.39,3631.89 r180 top
R28 "120R" CR3216-1206l 1840.55,3354.89 r180 top
R29 "120R" CR3216-1206l 413.39,3503.94 r180 top
R30 "120R" CR3216-1206l 1840.55,3225.53 r180 top
R31 "120R" CR3216-1206l 415.28,3375.98 r180 top
R32 "4.7k" CR3216-1206l 757.87,1891.65 r270 top
R33 "4.7k" CR3216-1206l 856.3,1889.76 r270 top
R34 "4.7k" CR3216-1206l 954.72,1891.65 r270 top
R35 "120R" CR3216-1206l 1840.55,3096.18 r180 top
R36 "120R" CR3216-1206l 413.39,3248.03 r180 top
R37 "4.7k" CR3216-1206l 96.54,2155.51 r0 top
R38 "4.7k" CR3216-1206l 98.43,1958.66 r0 top
R39 "4.7k" CR3216-1206l 96.54,1761.81 r0 top
R40 "120R" CR3216-1206l 1840.55,2966.82 r180 top
R41 "120R" CR3216-1206l 413.39,3120.08 r180 top
R42 "120R" CR3216-1206l 1840.55,2837.46 r180 top
R43 "120R" CR3216-1206l 416.22,2992.13 r180 top
R44 "120R" CR3216-1206l 1840.55,2708.1 r180 top
R45 "120R" CR3216-1206l 415.28,2864.17 r180 top
R46 "120R" CR3216-1206l 1840.55,2578.74 r180 top
R47 "120R" CR3216-1206l 415.28,2736.22 r180 top
R48 "4.7k" CR3216-1206l 216.54,2057.09 r180 top
R49 "4.7k" CR3216-1206l 218.43,1860.24 r180 top
R50 "4.7k" CR3216-1206l 216.54,1663.39 r180 top
R51 "120R" CR3216-1206l 1151.57,3545.2 r270 top
R52 "120R" CR3216-1206l 1043.31,3423.31 r90 top
R53 "0R" CR3216-1206l 1200.79,1537.32 r270 top
R54 "0R" CR3216-1206l 1299.21,1535.43 r270 top
R55 "120R" CR3216-1206l 1712.6,1427.17 r180 top
R56 "120R" CR3216-1206l 494.02,1437.01 r180 top
R57 "120R" CR3216-1206l 1712.6,1328.74 r180 top
R58 "120R" CR3216-1206l 493.07,1289.37 r180 top
R59 "120R" CR3216-1206l 1710.71,1230.32 r180 top
R60 "120R" CR3216-1206l 494.02,1151.58 r180 top
R61 "120R" CR3216-1206l 1710.71,1131.89 r180 top
R62 "120R" CR3216-1206l 494.02,1013.78 r180 top
R63 "120R" CR3216-1206l 1712.6,1033.46 r180 top
R64 "120R" CR3216-1206l 492.13,875.98 r180 top
R65 "120R" CR3216-1206l 1710.71,935.04 r180 top
R66 "120R" CR3216-1206l 492.13,738.19 r180 top
R67 "4.7k" CR3216-1206l 698.82,76.85 r90 top
R68 "4.7k" CR3216-1206l 590.55,76.85 r90 top
R69 "120R" CR3216-1206l 1712.6,836.61 r180 top
R70 "120R" CR3216-1206l 492.13,610.24 r180 top
R71 "120R" CR3216-1206l 1710.71,738.19 r180 top
R72 "120R" CR3216-1206l 492.13,482.28 r180 top
R73 "1k" CR3216-1206l 834.72,521.65 r0 top
R74 "120R" CR3216-1206l 1602.44,305.12 r0 top
R75 "120R" CR3216-1206l 1043.31,521.65 r0 top
R76 "120R" CR3216-1206l 1092.52,1614.17 r270 top
R77 "120R" CR3216-1206l 1600.55,403.54 r0 top
R78 "120R" CR3216-1206l 1602.44,511.81 r0 top
R79 "1k" CR3216-1206l 1249.57,403.39 r0 top
R80 "120R" CR3216-1206l 994.09,1496.06 r90 top
R81 "Rf" CR3216-1206l 3248.03,2844.49 r180 top
R82 "Ri" CR3216-1206l 3761.73,1938.98 r180 top
R83 "100R" CR3216-1206l 3129.92,1968.5 r180 top
R84 "Ri" CR3216-1206l 3661.42,2677.17 r180 top
R85 "100R" CR3216-1206l 3043.23,2746.06 r180 top
R86 "Ri" CR3216-1206l 3661.42,2578.74 r180 top
R87 "Value" CR3216-1206l 3502.05,2076.77 r0 top
R88 "Rf" CR3216-1206l 3395.67,2885.75 r270 top
R89 "Value" CR3216-1206l 3623.94,2273.62 r180 top
R90 "Rf" CR3216-1206l 3139.76,2293.31 r180 top
R91 "Ri" CR3216-1206l 3692.83,1781.5 r180 top
R92 "Ri" CR3216-1206l 3525.51,2470.47 r180 top
R93 "100R" CR3216-1206l 3139.76,1712.6 r180 top
R94 "100R" CR3216-1206l 3013.7,2401.57 r180 top
R95 "Ri" CR3216-1206l 3525.51,2372.05 r180 top
R96 "Rf" CR3216-1206l 3238.19,2165.35 r90 top
R97 "Value" CR3216-1206l 3297.24,1545.28 r0 top
R98 "Value" CR3216-1206l 3417.24,1446.85 r180 top
R99 "Ri" CR3216-1206l 2881.97,3503.94 r0 top
R100 "100R" CR3216-1206l 3503.94,3425.2 r0 top
R101 "Ri" CR3216-1206l 2883.86,3277.56 r0 top
R102 "100R" CR3216-1206l 3492.2,2992.13 r0 top
R103 "Rf" CR3216-1206l 3612.2,3631.89 r270 top
R104 "Rf" CR3216-1206l 3612.2,3828.74 r270 top
R105 "Ri" CR3216-1206l 2881.97,3385.83 r0 top
R106 "100R" CR3216-1206l 3492.2,3090.55 r0 top
R107 "Rf" CR3216-1206l 3535.35,3188.98 r180 top
R108 "Rf" CR3216-1206l 3415.35,3277.56 r0 top
S1 "SWITCH TACT" "SWITCH TACTILE SMD 6x6 4.3mm" 2312.99,944.88 r0 top
S2 "SWITCH TACT" "SWITCH TACTILE SMD 6x6 4.3mm" 1673.23,918.43 r90 bottom
S3 "SWITCH TACT" "SWITCH TACTILE SMD 6x6 4.3mm" 600.39,1046.38 r90 bottom
S4 "SWITCH TACT" "SWITCH TACTILE SMD 6x6 4.3mm" 1318.9,974.41 r90 bottom
S5 "SWITCH TACT" "SWITCH TACTILE SMD 6x6 4.3mm" 885.83,1046.38 r90 bottom
S6 "SWITCH TACT" "SWITCH TACTILE SMD 6x6 4.3mm" 2352.36,590.55 r0 top
U1 "LD1117" SOT230P700X180-4N 2923.23,974.41 r180 top
U2 "IC-2576 V.REG.3A STEP DOWN SOP-8PP" SOIC127P600X175-8N 3720,840 r0 top
U3 "STM32F373RxT" LQFP64 2116.14,1535.43 r180 top
U4 "SST25VF080B" SOIC08-S2A 465.95,2347.43 r0 top
U5 "74HC245" SOIC127P1030X265-20M 1269.69,3061.02 r0 top
U6 "M24C64RMN" SOIC127P600X175-8N 472.44,1840.55 r0 top
U7 "74HC245" SOIC127P1030X265-20M 1230.32,1053.15 r0 top
U8 "MAX485" SOIC127P600X175-8N 1081.69,162.8 r180 top
U9 "LMV358" SOIC127P600X175-8N 3361.61,1871.06 r90 top
U10 "LMV358" SOIC127P600X175-8N 3198.82,2509.84 r90 top
U11 "LMV358" SOIC127P600X175-8N 3307.09,3592.52 r270 top
U12 "LMV358" SOIC127P600X175-8N 3193.5,3081.69 r90 top
Y1 "8MHz" "HC49S SMD" 2862.2,1413.39 r90 top

## Footprints (in the part's own frame and the unit in brackets; to place one, negate y for a bottom-side part, rotate by r counter-clockwise, add the part's x,y. Pads: shape width x height; smd on the part's side, far side on the other; paste and mask are expansions set on the pad)
B10S_R2 [mm]
  rect 1.84x0.9 smd: 1(0,0) 2(6,0) 3(6,-2.4) 4(0,-2.4)
  silkscreen extent -0.1,-3.5 4.6,1.1
"CAP AL-EL H12MM D8MM P3.5MM" [mil] "Aluminum Electrolytic Capacitor"
  round 60 hole 30: 1(-68.9,0) 2(68.9,0)
  silkscreen extent -157,-157 157,157, body extent -158,-157 158,157, height 493
CC3216-1206L [mm] "Chip Capacitor, Body 3.2x1.6mm, IPC Low Density"
  rect 1.3x1.8 smd: 1(-1.524,0) 2(1.524,0)
  silkscreen extent 0,-0.9 0,0.9, body extent -1.6,-0.8 1.6,0.8, height 0.77
CL3216-1206L [mm] "Chip Inductor, Body 3.2x1.6mm, IPC Medium Density"
  rect 1.3x1.8 smd: 1(0,0) 2(2.9,0)
  silkscreen extent 1.45,-0.9 1.45,0.9, body extent -0.15,-0.8 3.05,0.8, height 1.1
CR3216-1206l [mm] "Chip Resistor, Body 3.2 x 1.6 mm, IPC Low Density"
  rect 1.3x1.8 smd: 1(0,0) 2(3.048,0)
  silkscreen extent 1.52,-0.9 1.52,0.9, body extent -0.15,-0.8 3.05,0.8, height 0.55
DG128-5.0-02P-14 [mm] "TERM.BLK.5.00MM 2P PCB TYPE 1 BOY GREEN"
  round 2.4 hole 1.4: 1(0,0) 2(5,0)
  silkscreen extent -3.02,-5.36 7.7,5.23, body extent -2.8,-5.18 7.5,5.02, height 14.11
DS1070-2MVV6 [mil] "Connector, 2p, 2.54mm, 180 degree"
  rect 65x80 hole 40: 1(0,0)
  oval 65x80 hole 40: 2(-100,0)
  silkscreen extent -155,-143 55,105, body extent -150,-138 50,94, height 449
FPI1005 [mm]
  rect 4.5x9 smd: 1(0,0) 2(7.8,0)
  silkscreen extent -2.75,-5 10.5,5, body extent -1.05,-4.5 8.85,4.5, height 5.45
"HC49S SMD" [mil] "SMD Crystal"
  rect 175x50 smd: 1(-175,0) 2(175,0)
  silkscreen extent -225,-100 225,100, body extent -264,-95 264,98, height 200
HDR_MALE_1X3_3P_2.54MM_180 [mil] "Male Header, 1x3, 3p, 2.54mm, 180 degree"
  rect 60x80 hole 40: 1(0,0)
  oval 60x80 hole 40: 2(-100,0) 3(-200,0)
  silkscreen extent -250,-50 50,50, body extent -250,-49 50,49, height 337
HDR_MALE_1X6_56_2.54MM_180 [mil] "Male Header, 1x6, 6p, 2.54mm, 180 degree"
  rect 60x70 hole 40: 1(0,0)
  oval 60x80 hole 40: 2(-100,0) 3(-200,0) 4(-300,0) 5(-400,0) 6(-500,0)
  silkscreen extent -550,-50 50,50, body extent -550,-50 50,50, height 363
HDR_MALE_2X5_10P_2.54MM_180 [mil] "Female Header, 10p, 2.54mm, 180 degree"
  rect 60x80 hole 40: 1(0,0)
  oval 60x80 hole 40: 2(0,-100) 3(-100,0) 4(-100,-100) 5(-200,0) 6(-200,-100) 7(-300,0) 8(-300,-100) 9(-400,0) 10(-400,-100)
  silkscreen extent -460,-150 60,52, body extent -450,-149 50,51, height 374
HDR_MALE_2X10_20P_2.54MM_180 [mil] "Male Header, 20p, 2.54mm, 180 degree"
  rect 60x80 hole 40: 1(0,0)
  oval 60x80 hole 40: 2(0,-100) 3(-100,0) 4(-100,-100) 5(-200,0) 6(-200,-100) 7(-300,0) 8(-300,-100) 9(-400,0) 10(-400,-100) 11(-500,0) 12(-500,-100) 13(-600,0) 14(-600,-100) 15(-700,0) 16(-700,-100) 17(-800,0) 18(-800,-100) 19(-900,0) 20(-900,-100)
  silkscreen extent -952,-150 50,52, body extent -950,-150 50,50, height 336
LCD1602 [mil] "2X16 LDC"
  round 0 hole 120 unplated: 0(-1476.38,-610.24) 0(-1476.38,610.23) 0(1476.38,-610.24) 0(1476.38,610.23)
  rect 70x120 hole 40: 1(-1259.84,610.24)
  oval 70x120 hole 40: 2(-1159.84,610.24) 3(-1059.84,610.24) 4(-959.84,610.24) 5(-859.84,610.24) 6(-759.84,610.24) 7(-659.84,610.24) 8(-559.84,610.24) 9(-459.84,610.24) 10(-359.84,610.24) 11(-259.84,610.24) 12(-159.84,610.24) 13(-59.84,610.24) 14(40.16,610.24) 15(140.16,610.24) 16(240.16,610.24)
  silkscreen extent -1575,-709 1575,709, body extent -1575,-709 1575,709, height 612
LED1206 [mm]
  rect 1.3x1.8 smd: 1(0,0) 2(2.9,0)
  silkscreen extent 1.3,-0.94 3.89,0.89, body extent -0.15,-0.8 3.05,0.8, height 1.11
LQFP64 [mm] "TSQFP, 64-Leads, Body 10,00x10,00mm, Pitch 0,50mm, IPC Medium Density"
  oval 1.4x0.3 smd: 1(-5.7,3.75) 2(-5.7,3.25) 3(-5.7,2.75) 4(-5.7,2.25) 5(-5.7,1.75) 6(-5.7,1.25) 7(-5.7,0.75) 8(-5.7,0.25) 9(-5.7,-0.25) 10(-5.7,-0.75) 11(-5.7,-1.25) 12(-5.7,-1.75) 13(-5.7,-2.25) 14(-5.7,-2.75) 15(-5.7,-3.25) 16(-5.7,-3.75) 33(5.7,-3.75) 34(5.7,-3.25) 35(5.7,-2.75) 36(5.7,-2.25) 37(5.7,-1.75) 38(5.7,-1.25) 39(5.7,-0.75) 40(5.7,-0.25) 41(5.7,0.25) 42(5.7,0.75) 43(5.7,1.25) 44(5.7,1.75) 45(5.7,2.25) 46(5.7,2.75) 47(5.7,3.25) 48(5.7,3.75)
  oval 0.3x1.4 smd: 17(-3.75,-5.7) 18(-3.25,-5.7) 19(-2.75,-5.7) 20(-2.25,-5.7) 21(-1.75,-5.7) 22(-1.25,-5.7) 23(-0.75,-5.7) 24(-0.25,-5.7) 25(0.25,-5.7) 26(0.75,-5.7) 27(1.25,-5.7) 28(1.75,-5.7) 29(2.25,-5.7) 30(2.75,-5.7) 31(3.25,-5.7) 32(3.75,-5.7) 49(3.75,5.7) 50(3.25,5.7) 51(2.75,5.7) 52(2.25,5.7) 53(1.75,5.7) 54(1.25,5.7) 55(0.75,5.7) 56(0.25,5.7) 57(-0.25,5.7) 58(-0.75,5.7) 59(-1.25,5.7) 60(-1.75,5.7) 61(-2.25,5.7) 62(-2.75,5.7) 63(-3.25,5.7) 64(-3.75,5.7)
  silkscreen extent -5.82,-4.6 4.6,4.6, body extent -6,-6 6,6, height 1.6
"MOUNTING HOLE ROUND NONPLATED 3MM PLASTIC" [mm] "Hole round nonplated, size 3mm, suitable for 3mm plastic screw"
  round 0 hole 3 unplated: 1(0,0)
  silkscreen extent -2.2,-2.2 2.2,2.2
SMB [mm] "DO-214-AA/SMB; 2 C-Bend Leads; Body 5.3 x 3.6 mm, inc. leads (LxW)"
  rect 1.52x2.3 smd: 1(2.135,0) 2(-2.135,0)
  silkscreen extent -2.25,-2.29 2.25,2.29, body extent -2.75,-1.95 2.75,1.95, height 2.42
SOD123 [mm]
  rect 1x1 smd: 1(0,0) 2(-2.992,0)
  silkscreen extent -3.94,-0.99 0.31,0.99, body extent -3.42,-0.85 0.43,0.85, height 1.46
SOIC08-S2A [mm]
  rect 2.5x0.7 smd: 1(0,0)
  oval 2.5x0.7 smd: 2(0,-1.27) 3(0,-2.54) 4(0,-3.81) 5(6.75,-3.81) 6(6.75,-2.54) 7(6.75,-1.27) 8(6.75,0)
  silkscreen extent 2.08,-4.44 4.66,0.64, body extent -0.77,-4.64 7.33,0.77, height 2.16
SOIC127P600X175-8N [mm] "SOIC, 8-Leads, Body 4,90x3,90mm, Pitch 1,27mm, IPC Medium Density"
  oval 2.1x0.7 smd: 1(-2.725,1.905) 2(-2.725,0.635) 3(-2.725,-0.635) 4(-2.725,-1.905) 5(2.725,-1.905) 6(2.725,-0.635) 7(2.725,0.635) 8(2.725,1.905)
  silkscreen extent -2.85,-2.5 1.22,3.01, body extent -3,-2.5 3,2.5, height 1.75
SOIC127P1030X265-20M [mm] "SOIC, 20-Leads, Body 13,0x7,6mm (max), Pitch 1,27mm, IPC Low Density"
  oval 2.1x0.7 smd: 1(-4.6,5.715) 2(-4.6,4.445) 3(-4.6,3.175) 4(-4.6,1.905) 5(-4.6,0.635) 6(-4.6,-0.635) 7(-4.6,-1.905) 8(-4.6,-3.175) 9(-4.6,-4.445) 10(-4.6,-5.715) 11(4.6,-5.715) 12(4.6,-4.445) 13(4.6,-3.175) 14(4.6,-1.905) 15(4.6,-0.635) 16(4.6,0.635) 17(4.6,1.905) 18(4.6,3.175) 19(4.6,4.445) 20(4.6,5.715)
  silkscreen extent -4.72,-6.5 2.9,6.82, body extent -5.16,-6.3 5.24,6.3, height 2.6
SOT230P700X180-4N [mm] "SOT223, 4-Leads, Body 6.50x7.00mm (avg), Pitch 2.30mm, IPC Medium Density"
  rect 2.1x0.9 smd: 1(-2.95,2.3) 2(-2.95,0) 3(-2.95,-2.3)
  rect 2.1x3.2 smd: 4(2.95,0)
  silkscreen extent -3.08,-3.35 1.6,3.42, body extent -3.5,-3.35 3.5,3.35, height 1.8
"SWITCH TACTILE SMD 6x6 4.3mm" [mm] "Tact Switch, SMD, 4 Leads, 6x6mm, 4.3mm Height"
  rect 1.55x1.3 smd: 1(-1.778,0) 2(6.172,0) 3(-1.778,-4.5) 4(6.172,-4.5)
  silkscreen extent -0.76,-5.21 5.16,0.71, body extent -2.3,-5.35 6.7,0.85, height 4.1
"TRIMPOT 3386" [mil] "SINGLE TURN"
  rrect50% 80x80 hole 40: 1(100,-66) 2(0,134) 3(-100,-66)
  silkscreen extent -188,-155 189,222, body extent -188,-155 189,222, height 195

## Part data
C1 C2 C3 C6 C7 C8 C9 C10 C11 C12 C13 C14 C15 C16 C17 C18 C19 C20 C21 C22 C23 C24 C25 C26 C27 C28 C29 C30 C31 C32 C33 C34 C35 C36 C37 C38 C39 C40 C41 C42 C43 C44 C45 C46 C47 C48 C49 C50 C51 C52 C53 C54 C55 C56 C57 C58 C59 C60 C61 C62 C63 C64 C65 C66 C67 C68 C69 C70: library part "CAPACITOR NON-POL", "Capacitor", Component Type=Capacitor
C4 C5: library part "CAPACITOR POL", "Capacitor", Component Type=Capacitor
D1: library part "DIODE DRIDGE", Component Type=Diode
D2: library part "DIODE SCHOTTKY", "SINGLE SCHOTTKY DIODE / Check the suitability of the case with the pin number", Component Type=Diode
D3: library part "DIODE ZENER", "DIODE ZENER", Component Type=Diode
L1: library part INDUCTOR, Component Type=Inductor
L2: "FERRITE BEAD", Component Type=Inductor
P2: "LCD CONNECTOR 1x16", Component Type=Connector
P8 P9: library part "CONNECTOR, 2x5, 10P", "CONNECTOR, 2x5, 10P", Component Type=Connector
R2 R3 R4 R5 R6 R7 R8 R9 R10 R11 R12 R13 R14 R15 R16 R17 R18 R19 R20 R21 R22 R23 R24 R25 R26 R27 R28 R29 R30 R31 R32 R33 R34 R35 R36 R37 R38 R39 R40 R41 R42 R43 R44 R45 R46 R47 R48 R49 R50 R51 R52 R53 R54 R55 R56 R57 R58 R59 R60 R61 R62 R63 R64 R65 R66 R67 R68 R69 R70 R71 R72 R73 R74 R75 R76 R77 R78 R79 R80 R81 R82 R83 R84 R85 R86 R87 R88 R89 R90 R91 R92 R93 R94 R95 R96 R97 R98 R99 R100 R101 R102 R103 R104 R105 R106 R107 R108: library part RESISTOR, "Resistor", Component Type=Resistor
S1 S2 S3 S4 S5 S6: "TACT SWITCH", Component Type=Switch
U1: "Linear Voltage Regulators", Component Type=IC
U2: library part LM2576DP, "3A, 52kHz, Step-Down Switching Regulator"
U5 U7: "IC BUS TRANSCEIVER 8BIT 20-Pin", Component Type=IC
U8: "ROHS-ICMAX485CSA MAXIM", Component Type=IC
U9 U10 U11 U12: library part OPAMP2, "Dual Opamp", Component Type=IC
Y1: library part XTAL, Component Type=XTAL
H1 H2 H3 H4 H5: Component Type=Diode
P1 P3 P4 P5 P6 P7: Component Type=Connector
R1: Component Type=Resistor
U4 U6: Component Type=IC

## Via types
v1: diameter 30, hole 20, Top Layer to Bottom Layer, 227 vias

## Nets (pads, with @x,y where several pads share a name; then routed paths per layer and width w, separated by ;. In a path a pad name is that pad's centre, name@x,y a point inside that pad or via, vN(x,y) a via of type N, cw(c..) or ccw(c..) an arc to the next point about the centre after c; other vN are vias at no path point)
0V: C1.2 C2.2 C3.2 C4.2 C5.2 C6.2 C7.2 C8.2 C9.2 C10.2 C11.2 C12.2 C13.2 C14.2 C15.2 C16.2 C17.2 C18.2 C19.2 C20.2 C21.2 C22.2 C23.2 C24.2 C25.2 C26.1 C27.2 C28.1 C29.2 C30.2 C31.2 C32.2 C33.2 C34.1 C35.2 C36.2 C37.2 C38.2 C39.2 C40.2 C41.2 C42.2 C43.2 C44.1 C45.2 C46.2 C47.2 C48.2 C49.2 C50.2 C51.2 C52.2 C53.2 C54.2 C55.2 C57.2 C58.2 C59.1 C60.2 C61.2 C64.1 C65.2 C66.2 C68.2 C69.2 C70.2 D1.4 D2.1 D3.1 H1.2 H2.2 H3.2 H4.2 H5.2 P2.1 P2.5 P2.7 P2.8 P2.9 P2.10 P3.1 P4.3 P5.2 P5.4 P5.6 P5.8 P5.10 P5.12 P5.14 P5.16 P5.18 P5.20 P6.2 P6.4 P6.6 P6.8 P6.10 P6.12 P6.14 P6.16 P6.18 P6.20 P8.2 P8.8 P8.10 P9.2 P9.4 P9.6 P9.8 P9.10 R1.3 R7.1 R48.2 R49.2 R50.2 R52.2 R79.2 R80.2 R88.1 R89.2 R96.1 R98.2 R104.1 R108.1 S1.3 S1.4 S2.3 S2.4 S3.3 S3.4 S4.3 S4.4 S5.3 S5.4 S6.3 S6.4 U1.1 U2.4 U2.6 U3.12 U3.31 U3.63 U4.4 U5.10 U5.19 U6.4 U7.10 U7.19 U8.5 U9.4 U10.4 U11.4 U11.5 U12.4 | length 7008.8
  Top Layer w8: U3.31@1988.19,1759.84 1988.19,1721.81 v1@1990,1720 ; U3.63@2244.09,1311.02 2244.09,1275.91 2250,1270 ; 2300,1610 2304.94,1605.06 2339.82,1605.06 U3.12@2340.55,1604.33
  Top Layer w20: v1@1990,1720 v1(2000,1710) ; 2250,1270 2298.41,1221.59 2351.25,1221.59 v1(2401.57,1171.26) ; v1(2289.78,1622.05) 2289.78,1620.22 2300,1610 ; U11.5@3232.09,3485.24 3233.53,3483.79 3233.53,3389.54 C68.2@3237.24,3385.83 ; v1(3520,750) 3568.11,750 3583.11,765 U2.4@3612.72,765
  Top Layer w40: v1(39.37,1663.39) R50.2@96.54,1663.39 ; v1(39.37,1860.24) R49.2@98.43,1860.24 ; v1(39.37,2057.09) R48.2@96.54,2057.09 ; P5.20@168.9,2761.42 P5.20@172.72,2757.59 ; P5.18@168.9,2861.42 P5.18@171.65,2864.17 ; P5.16@168.9,2961.42 P5.16@170.08,2962.6 ; P5.12@168.9,3161.42 P5.12@170.87,3159.45 ; P5.8@168.9,3361.42 P5.8@172.72,3365.24 ; P5.6@168.9,3461.42 P5.6@172.72,3465.24 ; P5.4@168.9,3561.42 P5.4@184.31,3561.42 ; P6.20@196.85,587.8 P6.20@199.61,590.55 ; P6.18@196.85,687.8 P6.18@198.03,688.98 ; P6.16@196.85,787.8 P6.16@197.24,787.4 ; P6.14@196.85,887.8 P6.14@198.82,885.83 ; P6.12@196.85,987.8 P6.12@200.39,984.25 ; P6.10@196.85,1087.8 P6.10@200.68,1083.97 ; P6.8@196.85,1187.8 P6.8@200,1190.94 ; P6.2@196.85,1487.8 P6.2@198.43,1486.22 ; v1(364.17,1722.44) 364.17,1764.57 U6.4@365.16,1765.55 ; v1(383.86,1633.86) C35.2@432.13,1633.86 ; v1(462.6,2155.51) 462.6,2194.08 U4.4@465.95,2197.43 ; C37.2@608.35,3503.94 v1(669.29,3503.94) ; C36.2@610.24,3631.89 v1(669.29,3631.89) ; C43.2@611.18,2736.22 v1(669.29,2736.22) ; C42.2@611.18,2864.17 v1(669.29,2864.17) ; C39.2@611.18,3248.03 v1(669.29,3248.03) ; C41.2@612.13,2992.13 v1(669.29,2992.13) ; C40.2@612.13,3120.08 v1(669.29,3120.08) ; C38.2@612.13,3375.98 v1(669.29,3375.98) ; C47.2@688.98,1289.37 v1(748.03,1289.37) ; C53.2@689.92,482.28 v1(748.03,482.28) ; C52.2@689.92,610.24 v1(748.03,610.24) ; C51.2@689.92,738.19 v1(748.03,738.19) ; C50.2@689.92,875.98 v1(748.03,875.98) ; C49.2@689.92,1013.78 v1(748.03,1013.78) ; C48.2@689.92,1151.58 v1(732.3,1151.57) ; C46.2@689.92,1437.01 v1(748.03,1437.01) ; v1(787.4,423.23) C54.2@835.67,423.23 ; v1(861.09,2642.8) 861.09,2591.38 C30.2@864.44,2588.02 ; C45.2@866.14,266.69 v1(866.14,314.96) ; U8.5@974.41,237.8 v1(974.41,275.59) ; v1(990,1660) 990,1620.16 R80.2@994.09,1616.06 ; v1(1040,3590) 1040,3546.61 R52.2@1043.31,3543.31 ; U7.10@1049.21,828.15 1053.15,824.21 v1(1053.15,787.4) ; U5.10@1088.58,2836.02 1090,2834.61 v1(1090,2800) ; v1(1269.68,1230.32) 1271.85,1228.15 U7.19@1411.42,1228.15 ; R79.2@1369.57,403.39 1369.72,403.54 v1(1417.32,403.54) ; C55.2@1370,521.65 v1(1417.32,521.65) ; v1(1390,1580) 1390,1541.97 1395.59,1536.38 C44.1@1397.64,1536.38 ; v1(1390,3240) 1446.81,3240 U5.19@1450.79,3236.02 ; C34.1@1486.22,3545.2 v1(1486.22,3592.52) ; P4.3@2193.31,78.74 P4.3@2194.88,80.31 ; S1.3@2242.99,767.72 2244.09,768.82 v1(2244.09,816.93) ; S6.3@2282.36,413.39 2283.46,414.49 v1(2283.46,462.6) ; C60.2@2403.54,2193.86 v1(2403.54,2242.13) ; R7.1@2411.42,307.01 2413.31,305.12 v1(2470.47,305.12) ; C27.2@2461.57,1023.62 2467.17,1029.21 2467.17,1039.05 2515.43,1039.05 v1(2529.53,1053.15) ; C70.2@2500.94,679.13 v1(2549.21,679.13) ; C65.2@2541.34,2189.92 v1(2541.34,2238.19) ; S1.4@2555.98,767.72 2559.06,770.79 v1(2559.06,816.93) ; S6.4@2595.35,413.39 2598.43,416.46 v1(2598.43,462.6) ; v1(2657.48,1775.59) 2672.52,1790.63 2707.01,1790.63 C26.1@2712.6,1796.22 ; C28.1@2712.6,1294.33 2716.54,1290.39 v1(2716.54,1244.09) ; C59.1@2783.46,2158.43 2785.75,2158.43 2795.28,2167.95 v1(2795.28,2208.66) ; v1(2874.02,2598.43) 2916.69,2598.43 2922.28,2604.02 C57.2@2922.28,2608.27 ; C64.1@2879.92,2044.25 v1(2879.92,2092.52) ; v1(3001.97,1850.39) C58.2@3050.24,1850.39 ; v1(3020,720) C2.2@3020,780 C2.2@3020,789.84 ; U1.1@3039.37,883.86 3058.43,883.86 3090.55,851.73 v1(3090.55,846.46) ; v1(3080.71,78.74) D3.1@3130.24,78.74 ; v1(3139.76,3385.83) C69.2@3139.76,3435.98 ; D1.4@3149.61,501.97 v1(3149.61,561.02) ; v1(3198.82,3700.79) 3231.1,3700.79 U11.4@3232.09,3699.8 ; C68.2@3237.24,3385.83 v1(3287.4,3385.83) ; v1(3238.19,2116.14) R96.1@3238.19,2165.35 ; v1(3248.03,1446.85) R98.2@3297.24,1446.85 ; U12.4@3268.5,2974.41 3274.09,2980 v1(3310,2980) ; U10.4@3273.82,2402.56 3274.8,2401.57 v1(3307.09,2401.57) ; v1(3336.61,2116.14) C66.2@3336.61,2164.41 ; H1.2@3375.98,122.05 3379.92,118.11 v1(3435.04,118.11) ; R88.1@3395.67,2885.75 v1(3395.67,2929.69) ; R108.1@3415.35,3277.56 3417.8,3280 v1(3470,3280) ; U9.4@3436.61,1763.78 3436.61,1748.66 3462.83,1722.44 v1(3474.41,1722.44) ; v1(3450,2280) 3498.35,2280 3503.94,2274.41 R89.2@3503.94,2273.62 ; C61.2@3513.78,2894.65 3514.72,2893.7 v1(3572.83,2893.7) ; v1(3533.46,88.58) 3553.15,88.58 3582.68,59.06 H3.2@3592.52,59.06 ; C1.2@3606.3,1554.17 3607.24,1555.12 v1(3665.35,1555.12) ; R104.1@3612.2,3828.74 v1(3612.2,3877.95) ; H2.2@3755.91,1669.29 3759.84,1673.23 v1(3759.84,1728.35)
  Bottom Layer w40: v1(403.54,1377.95) 446.22,1377.95 451.81,1383.54 C31.2@451.81,1387.8 ; v1(423.23,925.2) S3.3@423.23,976.38 ; S3.4@423.23,1289.37 423.23,1284.45 462.6,1245.08 v1(462.6,1220.47) ; S5.3@708.66,976.38 708.66,981.3 714.25,986.89 719.17,986.89 726.38,994.09 v1(787.4,994.09) ; S5.4@708.66,1289.37 v1(708.66,1348.43) ; v1(748.03,875.98) C33.2@815.98,875.98 ; v1(1131.89,679.13) C32.2@1180.16,679.13 ; S4.3@1141.73,904.41 1142.83,905.51 v1(1190.94,905.51) ; S4.4@1141.73,1217.4 1144.8,1220.47 v1(1190.94,1220.47) ; H4.2@1387.8,2437.01 v1(1387.8,2500) ; S2.3@1496.06,848.43 1490.47,842.83 1490.47,791.65 v1(1476.38,777.56) 1504.96,777.56 1534.49,748.03 C29.2@1534.49,738.19 ; S2.4@1496.06,1161.42 1496.06,1156.5 1501.65,1150.91 1533.94,1150.91 v1(1543.12,1141.73) ; v1(1653.54,3720.47) 1711.65,3720.47 C3.2@1712.6,3721.42 ; C21.2@1830.71,1861.18 C20.2@1919.29,1861.18 v1(1919.29,1919.29) ; v1(1860.24,2106.3) 1860.24,2170.47 R1.3@1861.81,2172.05 ; v1(1870.08,1318.9) H5.2@1923.23,1318.9 ; v1(1870.08,3553.15) C11.2@1870.08,3601.42 ; v1(1978.35,2066.93) 2065.04,2066.93 C12.2@2066.93,2068.82 2067.4,2068.35 2174.72,2068.35 C13.2@2175.2,2067.87 ; v1(1988.19,3553.15) C10.2@1988.19,3601.42 ; v1(2086.61,1673) 2086.61,1615.12 C18.2@2087.56,1614.17 C19.2@2087.56,1525.59 ; v1(2096.46,3553.15) C9.2@2096.46,3601.42 ; v1(2155.51,1555.12) C24.2@2203.78,1555.12 C25.2@2203.78,1466.54 ; C15.2@2175.2,1632.91 2189.69,1632.91 2190.63,1633.86 2275.59,1633.86 2287.4,1622.05 v1(2289.78,1622.05) ; v1(2185.04,1043.31) C14.2@2185.04,1090.63 ; v1(2204.72,3553.15) C8.2@2204.72,3601.42 ; P2.10@2269.29,3838.58 P2.10@2273.62,3834.25 ; v1(2273.62,1043.31) C17.2@2273.62,1091.57 ; v1(2322.83,1948.82) C22.2@2322.83,1890.71 2328.43,1885.12 2377.64,1885.12 2401.57,1861.18 C23.2@2411.42,1861.18 ; P2.9@2369.29,3838.58 P2.9@2372.05,3835.83 ; v1(2401.57,1171.26) C16.2@2401.57,1219.53 ; P2.8@2469.29,3838.58 P2.8@2470.47,3837.4 ; P2.7@2568.9,3838.19 P2.7@2569.29,3838.58 ; v1(2618.11,3592.52) 2676.22,3592.52 C7.2@2677.17,3591.57 ; P2.5@2765.75,3835.04 P2.5@2769.29,3838.58 ; v1(2814.96,3602.36) 2873.07,3602.36 C6.2@2874.02,3601.42 ; P8.8@3855.25,2278.74 P8.8@3859.84,2278.74 ; P8.2@3855.25,2578.74 P8.2@3859.84,2578.74
  other v1: 3842.52,688.98 3854.33,988.19 3854.33,1153.54
3V3D: C2.1 C3.1 C12.1 C14.1 C15.1 C16.1 C17.1 C30.1 C35.1 L2.2 P2.2 R2.2 R5.1 R12.1 R13.2 R14.2 R15.2 R16.2 R17.2 R18.2 R20.1 R21.1 R22.1 R25.1 R32.1 R33.1 R34.1 R37.1 R38.1 R39.1 R54.1 R67.1 R68.1 U1.2 U1.4 U3.1 U3.19 U3.64 U4.8 U6.8 | length 6915.5
  Top Layer w8: U3.19@2224.41,1759.84 2224.41,1864.13 2234.25,1873.97 v1(2234.25,1879.92) ; U3.64@2263.78,1311.02 2263.78,1295.13 2265.54,1293.37 2289.31,1293.37 v1(2312.99,1269.68) ; v1(2332.68,1328.74) 2332.68,1386.03 2334.44,1387.8 U3.1@2340.55,1387.8
  Top Layer w20: R5.1@2312.99,1141.73 2324.72,1130 2420,1130 2420,1132.71 2433.57,1146.28 2433.57,1165.4 ; v1(2312.99,1269.68) 2314.91,1267.77 2350.32,1267.77 2433.57,1184.51 2433.57,1165.4 ; v1(2512.31,1180) 2448.18,1180 2433.57,1165.4
  Top Layer w40: v1(39.37,1761.81) R39.1@96.54,1761.81 ; v1(39.37,1958.66) R38.1@98.43,1958.66 ; v1(39.37,2155.51) R37.1@96.54,2155.51 ; v1(39.37,2263.78) R18.2@96.54,2263.78 ; v1(39.37,2362.2) R14.2@96.54,2362.2 ; v1(39.37,2460.63) R16.2@96.54,2460.63 ; v1(255.91,2588.58) 313.07,2588.58 R13.2@314.96,2590.47 ; C35.1@552.13,1633.86 v1(600.39,1633.86) ; U6.8@579.72,1915.55 583.46,1919.29 v1(649.61,1919.29) ; R68.1@590.55,76.85 v1(590.55,125.98) ; R15.2@593.95,2591.92 599.54,2597.51 v1(599.54,2646.79) ; v1(688.98,2646.79) 688.98,2595.28 R17.2@692.33,2591.92 ; R67.1@698.82,76.85 700,78.03 v1(700,130) ; U4.8@731.7,2347.43 737.92,2341.21 780.56,2341.21 783.56,2338.21 784.02,2338.21 787.02,2335.21 804.55,2335.21 v1(807.09,2332.68) ; R32.1@757.87,1891.65 v1(757.87,1938.98) ; v1(855.9,1939.79) 855.9,1890.16 R33.1@856.3,1889.76 ; C30.1@864.44,2468.02 866.83,2465.63 v1(929.98,2465.63) ; R34.1@954.72,1891.65 v1(954.72,1938.98) ; R54.1@1299.21,1535.43 1300,1536.22 v1(1300,1590) ; R25.1@1368.11,3545.2 v1(1368.11,3592.52) ; v1(3370,480) 3370,438.66 3375.59,433.07 R2.2@3375.98,433.07
  Bottom Layer w8: C15.1@2175.2,1752.91 2196.79,1774.5 2211.51,1774.5 2234.25,1797.24 v1(2234.25,1879.92) ; C14.1@2185.04,1210.63 2194.88,1210.63 2253.94,1269.68 v1(2312.99,1269.68) 2312.99,1263.73 2305.06,1255.79 2305.06,1233.17 2283.46,1211.57 C17.1@2273.62,1211.57 ; v1(2332.68,1328.74) C16.1@2390.79,1328.74
  Bottom Layer w20: v1(2234.25,1879.92) 2299.21,1814.96 2488.19,1814.96 2650,1653.15 ; v1(2410,1400) 2410,1500.53 2459.47,1550 2650,1550 ; v1(2512.31,1180) 2650,1180
  Bottom Layer w40: R20.1@452.76,1486.22 v1(452.76,1545.28) ; v1(757.87,787.4) 811.34,787.4 816.93,781.81 R22.1@816.93,777.56 ; v1(1131.89,767.72) 1173.62,767.72 1179.21,773.31 R21.1@1179.21,777.56 ; v1(1486.22,639.76) R12.1@1533.54,639.76 ; v1(1653.54,3602.36) 1711.65,3602.36 C3.1@1712.6,3601.42 ; v1(1978.35,1948.82) C12.1@2066.93,1948.82 2063.98,1945.87 2063.98,1863.19 L2.2@2061.02,1860.24 ; C16.1@2401.57,1339.53 2404.41,1339.53 2410,1345.12 v1(2410,1400) ; v1(2640,1040) 2650,1050 2650,1180 2650,1550 2650,1653.15 ; 2650,1570 2970,1890 2970,3606.65 3006.29,3642.94 3006.29,3762.9 3041.97,3798.58 3046.17,3798.58 3069.29,3821.7 P2.2@3069.29,3838.58
  other v1: 2640,860 2740,860 2640,950 2740,950